# EAGLE board kfly_v3.1_panel (EAGLE 6.5.0), part 1 of 4
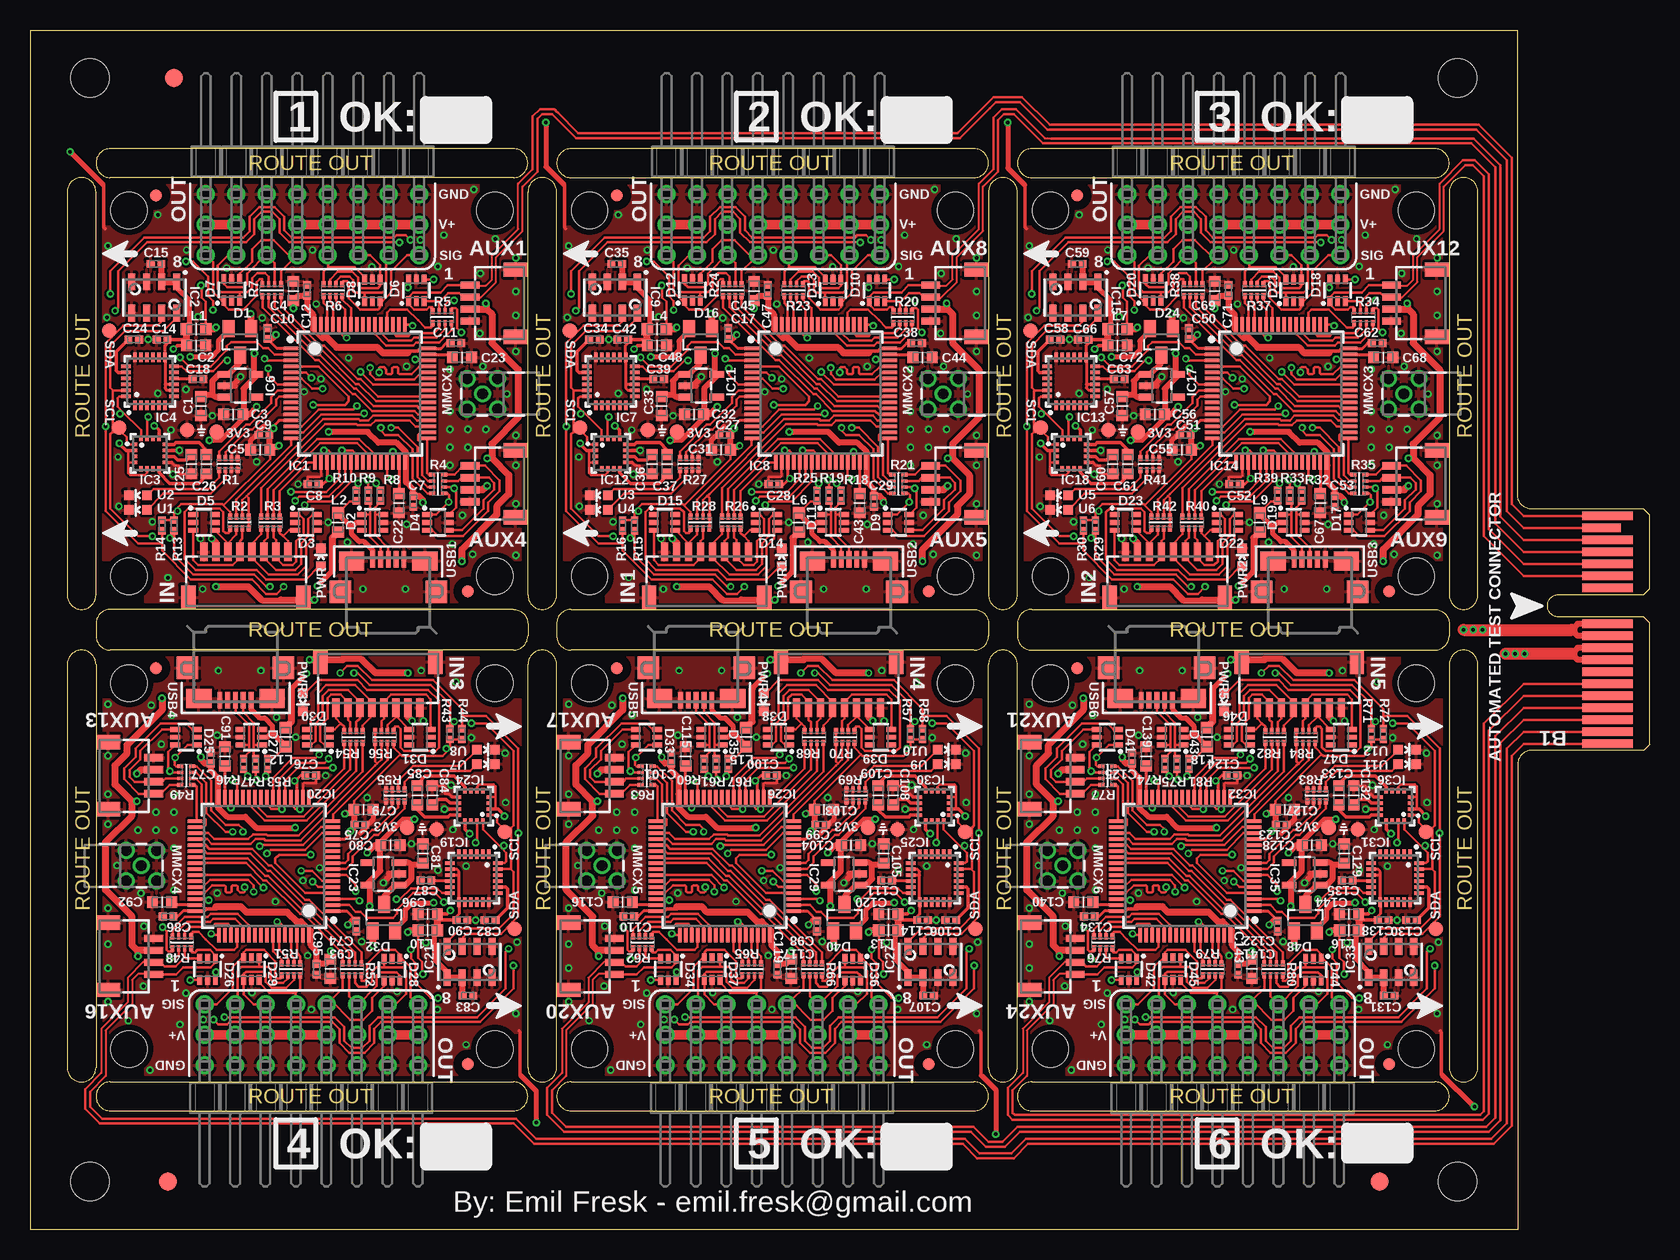
[diagram p0: board, top side]
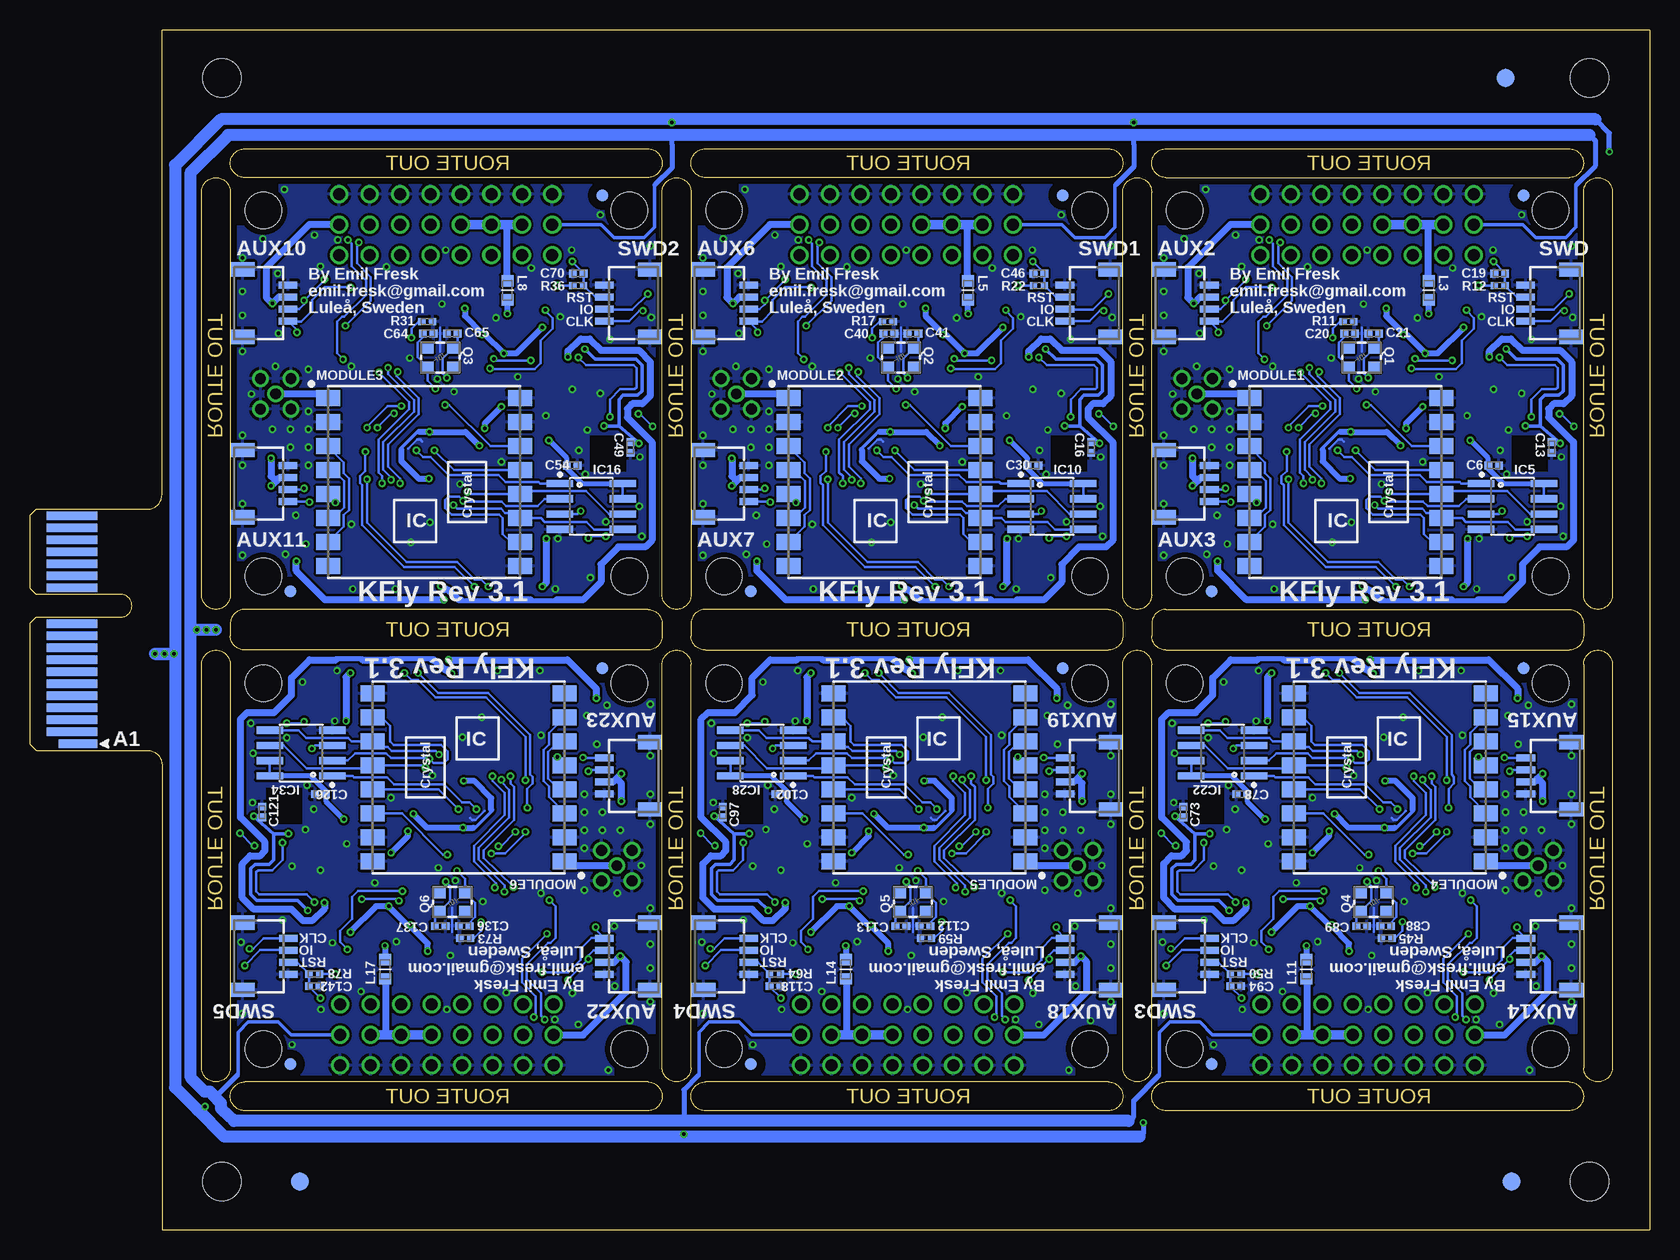
[diagram p1: board, bottom side, seen from below]

Size 135 x 100 mm. Coordinates in mm from the lower left corner, seen from the top.
Outline: 126,60.05 125.2,60.05 arc-90 124,61.25 124,100 0,100 0,0 124,0 124,38.75 arc-90 125.2,39.95 126,39.95
Outline: 5.5,47.1 5.5,13.5 arc-90 4.3,12.3 arc-90 3.1,13.5 3.1,47.1 arc-90 4.3,48.3 arc-90 5.5,47.1
Outline: 6.7,12.3 40.3,12.3 arc-90 41.5,11.1 arc-90 40.3,9.9 6.7,9.9 arc-90 5.5,11.1 arc-90 6.7,12.3
Outline: 41.5,13.5 41.5,47.1 arc-90 42.7,48.3 arc-90 43.9,47.1 43.9,13.5 arc-90 42.7,12.3 arc-90 41.5,13.5
Outline: 40.3,48.3 6.7,48.3 arc-90 5.5,49.5 5.5,50.5 arc-90 6.7,51.7 40.3,51.7 arc-90 41.5,50.5 41.5,49.5 arc-90 40.3,48.3
Outline: 45.1,12.3 78.7,12.3 arc-90 79.9,11.1 arc-90 78.7,9.9 45.1,9.9 arc-90 43.9,11.1 arc-90 45.1,12.3
Outline: 79.9,13.5 79.9,47.1 arc-90 81.1,48.3 arc-90 82.3,47.1 82.3,13.5 arc-90 81.1,12.3 arc-90 79.9,13.5
Outline: 78.7,48.3 45.1,48.3 arc-90 43.9,49.5 43.9,50.5 arc-90 45.1,51.7 78.7,51.7 arc-90 79.9,50.5 79.9,49.5 arc-90 78.7,48.3
Outline: 83.5,12.3 117.1,12.3 arc-90 118.3,11.1 arc-90 117.1,9.9 83.5,9.9 arc-90 82.3,11.1 arc-90 83.5,12.3
Outline: 83.5,48.3 117.1,48.3 arc90 118.3,49.5 118.3,50.5 arc90 117.1,51.7 83.5,51.7 arc90 82.3,50.5 82.3,49.5 arc90 83.5,48.3
Outline: 118.3,47.1 118.3,13.5 arc90 119.5,12.3 arc90 120.7,13.5 120.7,47.1 arc90 119.5,48.3 arc90 118.3,47.1
Outline: 5.5,52.9 5.5,86.5 arc90 4.3,87.7 arc90 3.1,86.5 3.1,52.9 arc90 4.3,51.7 arc90 5.5,52.9
Outline: 41.5,52.9 41.5,86.5 arc-90 42.7,87.7 arc-90 43.9,86.5 43.9,52.9 arc-90 42.7,51.7 arc-90 41.5,52.9
Outline: 40.3,87.7 6.7,87.7 arc-90 5.5,88.9 arc-90 6.7,90.1 40.3,90.1 arc-90 41.5,88.9 arc-90 40.3,87.7
Outline: 45.1,87.7 78.7,87.7 arc90 79.9,88.9 arc90 78.7,90.1 45.1,90.1 arc90 43.9,88.9 arc90 45.1,87.7
Outline: 79.9,86.5 79.9,52.9 arc90 81.1,51.7 arc90 82.3,52.9 82.3,86.5 arc90 81.1,87.7 arc90 79.9,86.5
Outline: 83.5,87.7 117.1,87.7 arc90 118.3,88.9 arc90 117.1,90.1 83.5,90.1 arc90 82.3,88.9 arc90 83.5,87.7
Outline: 118.3,86.5 118.3,52.9 arc90 119.5,51.7 arc90 120.7,52.9 120.7,86.5 arc90 119.5,87.7 arc90 118.3,86.5
Copper layers (1*2*15*16): Top 0.035mm / dielectric 0.4mm / Route2 0.035mm / dielectric 0.4mm / Route15 0.035mm / dielectric 0.4mm / Bottom 0.035mm
Design rules "korken_default": minimum track width 0.15mm, minimum drill 0.3mm, track to track 0.15mm, track to pad 0.15mm, pad to pad 0.15mm, via to via 0.15mm, smd to smd 0mil, copper to edge 0.5mm, drill to drill 0.25mm, minimum pad ring 10mil, minimum via ring 0.15mm, stop-mask expansion 0.05mm, vias tented up to drill 0.4mm, thermal gap 0.25mm
Holes 3.2 mm at 5,4 119,4 119,96 5,96
Holes 3 mm at 8.25,54.45 38.75,54.45 38.75,84.95 8.25,84.95 46.65,54.45 77.15,54.45 77.15,84.95 46.65,84.95 85.05,54.45 115.55,54.45 115.55,84.95 85.05,84.95 38.75,45.55 8.25,45.55 8.25,15.05 38.75,15.05 77.15,45.55 46.65,45.55 46.65,15.05 77.15,15.05 115.55,45.55 85.05,45.55 85.05,15.05 115.55,15.05

## Footprints (pad centres in the part's own frame; a part is rotated, then mirrored left to right if it is on the bottom)
JST-4PIN-SIDE = smd 0.6 x 1.55: 1 1.48,-2.81; 2 0.48,-2.81; 3 -0.52,-2.81; 4 -1.52,-2.81 | smd 1.2 x 2: NC1 2.78,0.99; NC2 -2.82,0.99
CAPC1608X92N = smd 0.9 x 0.95: 1 -0.8,0; 2 0.8,0
CAPC1005X60N = smd 0.65 x 0.65: 1 -0.45,0; 2 0.45,0
SOT23 = smd 1 x 1.4: 1 -0.95,-1.1; 2 0.95,-1.1; 3 0,1.1
SOT363 = smd 0.4 x 0.8: 1 -0.65,-0.9; 2 0,-0.9; 3 0.65,-0.9; 4 0.65,0.9; 5 0,0.9; 6 -0.65,0.9
FID1.5 = smd 1.5 x 1.5: P$1 0,0
PCI_2X18_PCB = smd 0.7 x 3.2 bottom: A1 -9.5,-0.5 | smd 0.7 x 4.2 bottom: A2 -8.5,-1; A3 -7.5,-1; A4 -6.5,-1; A5 -5.5,-1; A6 -4.5,-1; A7 -3.5,-1; A8 -2.5,-1; A9 -1.5,-1; A10 -0.5,-1; A11 0.5,-1; A12 3.5,-1; A13 4.5,-1; A14 5.5,-1; A15 6.5,-1; A16 7.5,-1; A17 8.5,-1; A18 9.5,-1 | smd 0.7 x 4.2: B1 -9.5,-1; B2 -8.5,-1; B3 -7.5,-1; B4 -6.5,-1; B5 -5.5,-1; B6 -4.5,-1; B7 -3.5,-1; B8 -2.5,-1; B9 -1.5,-1; B10 -0.5,-1; B11 0.5,-1; B12 3.5,-1; B13 4.5,-1; B14 5.5,-1; B15 6.5,-1; B16 7.5,-1; B18 9.5,-1 | smd 0.7 x 3.2: B17 8.5,-0.5
M03_90DEG = drill 1: 1 -2.54,0; 2 0,0; 3 2.54,0
FID1.0 = smd 1 x 1: P$1 0,0
LQFP64-10X10 = smd 0.3 x 1.2: 1 -3.75,-5.75; 2 -3.25,-5.75; 3 -2.75,-5.75; 4 -2.25,-5.75; 5 -1.75,-5.75; 6 -1.25,-5.75; 7 -0.75,-5.75; 8 -0.25,-5.75; 9 0.25,-5.75; 10 0.75,-5.75; 11 1.25,-5.75; 12 1.75,-5.75; 13 2.25,-5.75; 14 2.75,-5.75; 15 3.25,-5.75; 16 3.75,-5.75; 33 3.75,5.75; 34 3.25,5.75; 35 2.75,5.75; 36 2.25,5.75; 37 1.75,5.75; 38 1.25,5.75; 39 0.75,5.75; 40 0.25,5.75; 41 -0.25,5.75; 42 -0.75,5.75; 43 -1.25,5.75; 44 -1.75,5.75; 45 -2.25,5.75; 46 -2.75,5.75; 47 -3.25,5.75; 48 -3.75,5.75 | smd 1.2 x 0.3: 17 5.75,-3.75; 18 5.75,-3.25; 19 5.75,-2.75; 20 5.75,-2.25; 21 5.75,-1.75; 22 5.75,-1.25; 23 5.75,-0.75; 24 5.75,-0.25; 25 5.75,0.25; 26 5.75,0.75; 27 5.75,1.25; 28 5.75,1.75; 29 5.75,2.25; 30 5.75,2.75; 31 5.75,3.25; 32 5.75,3.75; 49 -5.75,3.75; 50 -5.75,3.25; 51 -5.75,2.75; 52 -5.75,2.25; 53 -5.75,1.75; 54 -5.75,1.25; 55 -5.75,0.75; 56 -5.75,0.25; 57 -5.75,-0.25; 58 -5.75,-0.75; 59 -5.75,-1.25; 60 -5.75,-1.75; 61 -5.75,-2.25; 62 -5.75,-2.75; 63 -5.75,-3.25; 64 -5.75,-3.75
MS5611 = smd 1.4 x 0.6: 1 -1.3,1.875; 2 -1.3,0.625; 3 -1.3,-0.625; 4 -1.3,-1.875; 5 1.3,-1.875; 6 1.3,-0.625; 7 1.3,0.625; 8 1.3,1.875
LPCC16 = smd 0.45 x 0.3: 1 -1.27,0.75; 2 -1.27,0.25; 3 -1.27,-0.25; 4 -1.27,-0.75; 9 1.27,-0.75; 10 1.27,-0.25; 11 1.27,0.25; 12 1.27,0.75 | smd 0.3 x 0.45: 5 -0.75,-1.27; 6 -0.25,-1.27; 7 0.25,-1.27; 8 0.75,-1.27; 13 0.75,1.27; 14 0.25,1.27; 15 -0.25,1.27; 16 -0.75,1.27
QFN-24 = smd 0.8 x 0.3: 1 -2,1.25; 2 -2,0.75; 3 -2,0.25; 4 -2,-0.25; 5 -2,-0.75; 6 -2,-1.25; 13 2,-1.25; 14 2,-0.75; 15 2,-0.25; 16 2,0.25; 17 2,0.75; 18 2,1.25 | smd 0.3 x 0.8: 7 -1.25,-2; 8 -0.75,-2; 9 -0.25,-2; 10 0.25,-2; 11 0.75,-2; 12 1.25,-2; 19 1.25,2; 20 0.75,2; 21 0.25,2; 22 -0.25,2; 23 -0.75,2; 24 -1.25,2
SO08 = smd 0.61 x 2.21: 1 -1.905,-2.616; 2 -0.635,-2.616; 3 0.635,-2.616; 4 1.905,-2.616; 5 1.905,2.616; 6 0.635,2.616; 7 -0.635,2.616; 8 -1.905,2.616
SOT23-5 = smd 0.55 x 1.2: 1 -0.95,-1.3; 2 0,-1.3; 3 0.95,-1.3; 4 0.95,1.3; 5 -0.95,1.3
JST-8PIN-SIDE = smd 0.6 x 1.55: 1 3.5,-2.8; 2 2.5,-2.8; 3 1.5,-2.8; 4 0.5,-2.8; 5 -0.5,-2.8; 6 -1.5,-2.8; 7 -2.5,-2.8; 8 -3.5,-2.8 | smd 1.2 x 2: NC1 4.8,1; NC2 -4.8,1
INDC1608X95N = smd 0.95 x 1: 1 -0.8,0; 2 0.8,0
MMCX_THROUGHHOLE_RIGHTANGLE = drill 0.9: G1 -1.27,1.27; G2 1.27,1.27; G3 1.27,-1.27; G4 -1.27,-1.27; S 0,0
RFM22-XXX-S2 = smd 2 x 1.3: 1 -8,7; 2 -8,5; 3 -8,3; 4 -8,1; 5 -8,-1; 6 -8,-3; 7 -8,-5; 8 -8,-7; 9 8,-7; 10 8,-5; 11 8,-3; 12 8,-1; 13 8,1; 14 8,3; 15 8,5; 16 8,7
LED-0603 = smd 0.8 x 0.8: A 0,-0.75; C 0,0.75
2.5X3.2CRYSTAL = smd 1 x 0.9: 1 -1.075,-0.775; 2 1.075,-0.775; 3 1.075,0.775; 4 -1.075,0.775
RESISTORARRAY_0804 = smd 0.33 x 0.5: 1 -0.775,-0.5; 4 0.775,-0.5; 5 0.775,0.5; 8 -0.775,0.5 | smd 0.28 x 0.5: 2 -0.25,-0.5; 3 0.25,-0.5; 6 0.25,0.5; 7 -0.25,0.5
RESC1005X40AN = smd 0.6 x 0.6: 1 -0.45,0; 2 0.45,0
TESTPOINT_1.2 = smd 1.2 x 1.2: 1 0,0
MICROUSB_TYPEB_SURFACE = smd 0.4 x 1.35: 1 -1.3,2.65; 2 -0.65,2.65; 3 0,2.65; 4 0.65,2.65; 5 1.3,2.65 | smd 1.8 x 1.9: MNT1 -4,-0.05; MNT2 4,-0.05 | smd 2.1 x 1.6: MNT3 3.05,2.5; MNT4 -3.05,2.5

## Placement (x,y rotation side)
AUX1  JST-4PIN-SIDE-1.0  [JST-4PIN-SIDE]  39.5,77.2 270 top
AUX2  JST-4PIN-SIDE-1.0  [JST-4PIN-SIDE]  39.5,77.25 90 bottom
AUX3  JST-4PIN-SIDE-1.0  [JST-4PIN-SIDE]  39.5,62.2 90 bottom
AUX4  JST-4PIN-SIDE-1.0  [JST-4PIN-SIDE]  39.5,62.15 270 top
AUX5  JST-4PIN-SIDE-1.0  [JST-4PIN-SIDE]  77.9,62.15 270 top
AUX6  JST-4PIN-SIDE-1.0  [JST-4PIN-SIDE]  77.9,77.25 90 bottom
AUX7  JST-4PIN-SIDE-1.0  [JST-4PIN-SIDE]  77.9,62.2 90 bottom
AUX8  JST-4PIN-SIDE-1.0  [JST-4PIN-SIDE]  77.9,77.2 270 top
AUX9  JST-4PIN-SIDE-1.0  [JST-4PIN-SIDE]  116.3,62.15 270 top
AUX10  JST-4PIN-SIDE-1.0  [JST-4PIN-SIDE]  116.3,77.25 90 bottom
AUX11  JST-4PIN-SIDE-1.0  [JST-4PIN-SIDE]  116.3,62.2 90 bottom
AUX12  JST-4PIN-SIDE-1.0  [JST-4PIN-SIDE]  116.3,77.2 270 top
AUX13  JST-4PIN-SIDE-1.0  [JST-4PIN-SIDE]  7.5,37.85 90 top
AUX14  JST-4PIN-SIDE-1.0  [JST-4PIN-SIDE]  7.5,22.75 270 bottom
AUX15  JST-4PIN-SIDE-1.0  [JST-4PIN-SIDE]  7.5,37.8 270 bottom
AUX16  JST-4PIN-SIDE-1.0  [JST-4PIN-SIDE]  7.5,22.8 90 top
AUX17  JST-4PIN-SIDE-1.0  [JST-4PIN-SIDE]  45.9,37.85 90 top
AUX18  JST-4PIN-SIDE-1.0  [JST-4PIN-SIDE]  45.9,22.75 270 bottom
AUX19  JST-4PIN-SIDE-1.0  [JST-4PIN-SIDE]  45.9,37.8 270 bottom
AUX20  JST-4PIN-SIDE-1.0  [JST-4PIN-SIDE]  45.9,22.8 90 top
AUX21  JST-4PIN-SIDE-1.0  [JST-4PIN-SIDE]  84.3,37.85 90 top
AUX22  JST-4PIN-SIDE-1.0  [JST-4PIN-SIDE]  84.3,22.75 270 bottom
AUX23  JST-4PIN-SIDE-1.0  [JST-4PIN-SIDE]  84.3,37.8 270 bottom
AUX24  JST-4PIN-SIDE-1.0  [JST-4PIN-SIDE]  84.3,22.8 90 top
C1  10u  [CAPC1608X92N]  14.25,68.65 270 top
C2  10u  [CAPC1608X92N]  13.85,73.7 0 top
C3  10u  [CAPC1608X92N]  16.95,67.95 180 top
C4  10u  [CAPC1608X92N]  21.95,78.25 90 top
C5  10u  [CAPC1608X92N]  19.2,65 180 top
C6  100n  [CAPC1005X60N]  13,63.7 0 bottom
C7  100n  [CAPC1005X60N]  31.95,60.7 270 top
C8  100n  [CAPC1005X60N]  23.6,62.15 180 top
C9  100n  [CAPC1005X60N]  19.5,66.25 180 top
C10  100n  [CAPC1005X60N]  19.8,74.7 90 top
C11  100n  [CAPC1005X60N]  35.5,73.9 0 top
C12  100n  [CAPC1005X60N]  23.1,78.3 90 top
C13  100n  [CAPC1005X60N]  8.15,65.2 270 bottom
C14  100n  [CAPC1005X60N]  11,74.2 180 top
C15  100n  [CAPC1005X60N]  10.5,80.5 180 top
C16  100n  [CAPC1005X60N]  46.55,65.2 270 bottom
C17  100n  [CAPC1005X60N]  58.2,74.7 90 top
C18  100n  [CAPC1005X60N]  14,70.9 0 top
C19  100n  [CAPC1005X60N]  12.5,79.7 180 bottom
C20  12p  [CAPC1005X60N]  25,74.7 180 bottom
C21  12p  [CAPC1005X60N]  23,74.7 0 bottom
C22  2.2u  [CAPC1608X92N]  30.75,60.55 270 top
C23  2.2u  [CAPC1608X92N]  36,72.7 0 top
C24  2.2n  [CAPC1005X60N]  8.65,74.2 0 top
C25  4.7u  [CAPC1608X92N]  13.45,63.8 270 top
C26  220n  [CAPC1608X92N]  14.7,63.8 90 top
C27  100n  [CAPC1005X60N]  57.9,66.25 180 top
C28  100n  [CAPC1005X60N]  62,62.15 180 top
C29  100n  [CAPC1005X60N]  70.35,60.7 270 top
C30  100n  [CAPC1005X60N]  51.4,63.7 0 bottom
C31  10u  [CAPC1608X92N]  57.6,65 180 top
C32  10u  [CAPC1608X92N]  55.35,67.95 180 top
C33  10u  [CAPC1608X92N]  52.65,68.65 270 top
C34  2.2n  [CAPC1005X60N]  47.05,74.2 0 top
C35  100n  [CAPC1005X60N]  48.9,80.5 180 top
C36  4.7u  [CAPC1608X92N]  51.85,63.8 270 top
C37  220n  [CAPC1608X92N]  53.1,63.8 90 top
C38  100n  [CAPC1005X60N]  73.9,73.9 0 top
C39  100n  [CAPC1005X60N]  52.4,70.9 0 top
C40  12p  [CAPC1005X60N]  63.4,74.7 180 bottom
C41  12p  [CAPC1005X60N]  61.4,74.7 0 bottom
C42  100n  [CAPC1005X60N]  49.4,74.2 180 top
C43  2.2u  [CAPC1608X92N]  69.15,60.55 270 top
C44  2.2u  [CAPC1608X92N]  74.4,72.7 0 top
C45  10u  [CAPC1608X92N]  60.35,78.25 90 top
C46  100n  [CAPC1005X60N]  50.9,79.7 180 bottom
C47  100n  [CAPC1005X60N]  61.5,78.3 90 top
C48  10u  [CAPC1608X92N]  52.25,73.7 0 top
C49  100n  [CAPC1005X60N]  84.95,65.2 270 bottom
C50  100n  [CAPC1005X60N]  96.6,74.7 90 top
C51  100n  [CAPC1005X60N]  96.3,66.25 180 top
C52  100n  [CAPC1005X60N]  100.4,62.15 180 top
C53  100n  [CAPC1005X60N]  108.75,60.7 270 top
C54  100n  [CAPC1005X60N]  89.8,63.7 0 bottom
C55  10u  [CAPC1608X92N]  96,65 180 top
C56  10u  [CAPC1608X92N]  93.75,67.95 180 top
C57  10u  [CAPC1608X92N]  91.05,68.65 270 top
C58  2.2n  [CAPC1005X60N]  85.45,74.2 0 top
C59  100n  [CAPC1005X60N]  87.3,80.5 180 top
C60  4.7u  [CAPC1608X92N]  90.25,63.8 270 top
C61  220n  [CAPC1608X92N]  91.5,63.8 90 top
C62  100n  [CAPC1005X60N]  112.3,73.9 0 top
C63  100n  [CAPC1005X60N]  90.8,70.9 0 top
C64  12p  [CAPC1005X60N]  101.8,74.7 180 bottom
C65  12p  [CAPC1005X60N]  99.8,74.7 0 bottom
C66  100n  [CAPC1005X60N]  87.8,74.2 180 top
C67  2.2u  [CAPC1608X92N]  107.55,60.55 270 top
C68  2.2u  [CAPC1608X92N]  112.8,72.7 0 top
C69  10u  [CAPC1608X92N]  98.75,78.25 90 top
C70  100n  [CAPC1005X60N]  89.3,79.7 180 bottom
C71  100n  [CAPC1005X60N]  99.9,78.3 90 top
C72  10u  [CAPC1608X92N]  90.65,73.7 0 top
C73  100n  [CAPC1005X60N]  38.85,34.8 90 bottom
C74  100n  [CAPC1005X60N]  27.2,25.3 270 top
C75  100n  [CAPC1005X60N]  27.5,33.75 0 top
C76  100n  [CAPC1005X60N]  23.4,37.85 0 top
C77  100n  [CAPC1005X60N]  15.05,39.3 90 top
C78  100n  [CAPC1005X60N]  34,36.3 180 bottom
C79  10u  [CAPC1608X92N]  27.8,35 0 top
C80  10u  [CAPC1608X92N]  30.05,32.05 0 top
C81  10u  [CAPC1608X92N]  32.75,31.35 90 top
C82  2.2n  [CAPC1005X60N]  38.35,25.8 180 top
C83  100n  [CAPC1005X60N]  36.5,19.5 0 top
C84  4.7u  [CAPC1608X92N]  33.55,36.2 90 top
C85  220n  [CAPC1608X92N]  32.3,36.2 270 top
C86  100n  [CAPC1005X60N]  11.5,26.1 180 top
C87  100n  [CAPC1005X60N]  33,29.1 180 top
C88  12p  [CAPC1005X60N]  22,25.3 0 bottom
C89  12p  [CAPC1005X60N]  24,25.3 180 bottom
C90  100n  [CAPC1005X60N]  36,25.8 0 top
C91  2.2u  [CAPC1608X92N]  16.25,39.45 90 top
C92  2.2u  [CAPC1608X92N]  11,27.3 180 top
C93  10u  [CAPC1608X92N]  25.05,21.75 270 top
C94  100n  [CAPC1005X60N]  34.5,20.3 0 bottom
C95  100n  [CAPC1005X60N]  23.9,21.7 270 top
C96  10u  [CAPC1608X92N]  33.15,26.3 180 top
C97  100n  [CAPC1005X60N]  77.25,34.8 90 bottom
C98  100n  [CAPC1005X60N]  65.6,25.3 270 top
C99  100n  [CAPC1005X60N]  65.9,33.75 0 top
C100  100n  [CAPC1005X60N]  61.8,37.85 0 top
C101  100n  [CAPC1005X60N]  53.45,39.3 90 top
C102  100n  [CAPC1005X60N]  72.4,36.3 180 bottom
C103  10u  [CAPC1608X92N]  66.2,35 0 top
C104  10u  [CAPC1608X92N]  68.45,32.05 0 top
C105  10u  [CAPC1608X92N]  71.15,31.35 90 top
C106  2.2n  [CAPC1005X60N]  76.75,25.8 180 top
C107  100n  [CAPC1005X60N]  74.9,19.5 0 top
C108  4.7u  [CAPC1608X92N]  71.95,36.2 90 top
C109  220n  [CAPC1608X92N]  70.7,36.2 270 top
C110  100n  [CAPC1005X60N]  49.9,26.1 180 top
C111  100n  [CAPC1005X60N]  71.4,29.1 180 top
C112  12p  [CAPC1005X60N]  60.4,25.3 0 bottom
C113  12p  [CAPC1005X60N]  62.4,25.3 180 bottom
C114  100n  [CAPC1005X60N]  74.4,25.8 0 top
C115  2.2u  [CAPC1608X92N]  54.65,39.45 90 top
C116  2.2u  [CAPC1608X92N]  49.4,27.3 180 top
C117  10u  [CAPC1608X92N]  63.45,21.75 270 top
C118  100n  [CAPC1005X60N]  72.9,20.3 0 bottom
C119  100n  [CAPC1005X60N]  62.3,21.7 270 top
C120  10u  [CAPC1608X92N]  71.55,26.3 180 top
C121  100n  [CAPC1005X60N]  115.65,34.8 90 bottom
C122  100n  [CAPC1005X60N]  104,25.3 270 top
C123  100n  [CAPC1005X60N]  104.3,33.75 0 top
C124  100n  [CAPC1005X60N]  100.2,37.85 0 top
C125  100n  [CAPC1005X60N]  91.85,39.3 90 top
C126  100n  [CAPC1005X60N]  110.8,36.3 180 bottom
C127  10u  [CAPC1608X92N]  104.6,35 0 top
C128  10u  [CAPC1608X92N]  106.85,32.05 0 top
C129  10u  [CAPC1608X92N]  109.55,31.35 90 top
C130  2.2n  [CAPC1005X60N]  115.15,25.8 180 top
C131  100n  [CAPC1005X60N]  113.3,19.5 0 top
C132  4.7u  [CAPC1608X92N]  110.35,36.2 90 top
C133  220n  [CAPC1608X92N]  109.1,36.2 270 top
C134  100n  [CAPC1005X60N]  88.3,26.1 180 top
C135  100n  [CAPC1005X60N]  109.8,29.1 180 top
C136  12p  [CAPC1005X60N]  98.8,25.3 0 bottom
C137  12p  [CAPC1005X60N]  100.8,25.3 180 bottom
C138  100n  [CAPC1005X60N]  112.8,25.8 0 top
C139  2.2u  [CAPC1608X92N]  93.05,39.45 90 top
C140  2.2u  [CAPC1608X92N]  87.8,27.3 180 top
C141  10u  [CAPC1608X92N]  101.85,21.75 270 top
C142  100n  [CAPC1005X60N]  111.3,20.3 0 bottom
C143  100n  [CAPC1005X60N]  100.7,21.7 270 top
C144  10u  [CAPC1608X92N]  109.95,26.3 180 top
D1  BAT54C  [SOT23]  17.5,74 180 top
D2  ESD5V3U4RRS  [SOT363]  28.55,58.95 270 top
D3  ESD5V3U4RRS  [SOT363]  23,58.95 270 top
D4  ESD5V3U4RRS  [SOT363]  34,58.95 270 top
D5  ESD5V3U4RRS  [SOT363]  14.5,58.95 270 top
D6  ESD5V3U4RRS  [SOT363]  32.2,78.3 0 top
D7  ESD5V3U4RRS  [SOT363]  16.82,78.34 0 top
D8  ESD5V3U4RRS  [SOT363]  28.54,78.29 0 top
D9  ESD5V3U4RRS  [SOT363]  72.4,58.95 270 top
D10  ESD5V3U4RRS  [SOT363]  70.6,78.3 0 top
D11  ESD5V3U4RRS  [SOT363]  66.95,58.95 270 top
D12  ESD5V3U4RRS  [SOT363]  55.22,78.34 0 top
D13  ESD5V3U4RRS  [SOT363]  66.94,78.29 0 top
D14  ESD5V3U4RRS  [SOT363]  61.4,58.95 270 top
D15  ESD5V3U4RRS  [SOT363]  52.9,58.95 270 top
D16  BAT54C  [SOT23]  55.9,74 180 top
D17  ESD5V3U4RRS  [SOT363]  110.8,58.95 270 top
D18  ESD5V3U4RRS  [SOT363]  109,78.3 0 top
D19  ESD5V3U4RRS  [SOT363]  105.35,58.95 270 top
D20  ESD5V3U4RRS  [SOT363]  93.62,78.34 0 top
D21  ESD5V3U4RRS  [SOT363]  105.34,78.29 0 top
D22  ESD5V3U4RRS  [SOT363]  99.8,58.95 270 top
D23  ESD5V3U4RRS  [SOT363]  91.3,58.95 270 top
D24  BAT54C  [SOT23]  94.3,74 180 top
D25  ESD5V3U4RRS  [SOT363]  13,41.05 90 top
D26  ESD5V3U4RRS  [SOT363]  14.8,21.7 180 top
D27  ESD5V3U4RRS  [SOT363]  18.45,41.05 90 top
D28  ESD5V3U4RRS  [SOT363]  30.18,21.66 180 top
D29  ESD5V3U4RRS  [SOT363]  18.46,21.71 180 top
D30  ESD5V3U4RRS  [SOT363]  24,41.05 90 top
D31  ESD5V3U4RRS  [SOT363]  32.5,41.05 90 top
D32  BAT54C  [SOT23]  29.5,26 0 top
D33  ESD5V3U4RRS  [SOT363]  51.4,41.05 90 top
D34  ESD5V3U4RRS  [SOT363]  53.2,21.7 180 top
D35  ESD5V3U4RRS  [SOT363]  56.85,41.05 90 top
D36  ESD5V3U4RRS  [SOT363]  68.58,21.66 180 top
D37  ESD5V3U4RRS  [SOT363]  56.86,21.71 180 top
D38  ESD5V3U4RRS  [SOT363]  62.4,41.05 90 top
D39  ESD5V3U4RRS  [SOT363]  70.9,41.05 90 top
D40  BAT54C  [SOT23]  67.9,26 0 top
D41  ESD5V3U4RRS  [SOT363]  89.8,41.05 90 top
D42  ESD5V3U4RRS  [SOT363]  91.6,21.7 180 top
D43  ESD5V3U4RRS  [SOT363]  95.25,41.05 90 top
D44  ESD5V3U4RRS  [SOT363]  106.98,21.66 180 top
D45  ESD5V3U4RRS  [SOT363]  95.26,21.71 180 top
D46  ESD5V3U4RRS  [SOT363]  100.8,41.05 90 top
D47  ESD5V3U4RRS  [SOT363]  109.3,41.05 90 top
D48  BAT54C  [SOT23]  106.3,26 0 top
E$1  [FID1.5]  12,96 0 top
E$2  [FID1.5]  12,96 0 bottom
E$3  [FID1.5]  11.5,4 0 top
E$4  [FID1.5]  11.5,4 0 bottom
E$5  [FID1.5]  112.5,4 0 top
E$6  [FID1.5]  112.5,4 0 bottom
E$7  [PCI_2X18_PCB]  130.5,50 90 top
ENGINE1  [M03_90DEG]  32.44,83.78 270 top
ENGINE2  [M03_90DEG]  29.9,83.78 270 top
ENGINE3  [M03_90DEG]  27.36,83.78 270 top
ENGINE4  [M03_90DEG]  24.82,83.78 270 top
ENGINE5  [M03_90DEG]  22.28,83.78 270 top
ENGINE6  [M03_90DEG]  19.74,83.78 270 top
ENGINE7  [M03_90DEG]  17.2,83.78 270 top
ENGINE8  [M03_90DEG]  14.66,83.78 270 top
ENGINE9  [M03_90DEG]  70.84,83.78 270 top
ENGINE10  [M03_90DEG]  68.3,83.78 270 top
ENGINE11  [M03_90DEG]  65.76,83.78 270 top
ENGINE12  [M03_90DEG]  63.22,83.78 270 top
ENGINE13  [M03_90DEG]  60.68,83.78 270 top
ENGINE14  [M03_90DEG]  58.14,83.78 270 top
ENGINE15  [M03_90DEG]  55.6,83.78 270 top
ENGINE16  [M03_90DEG]  53.06,83.78 270 top
ENGINE17  [M03_90DEG]  109.24,83.78 270 top
ENGINE18  [M03_90DEG]  106.7,83.78 270 top
ENGINE19  [M03_90DEG]  104.16,83.78 270 top
ENGINE20  [M03_90DEG]  101.62,83.78 270 top
ENGINE21  [M03_90DEG]  99.08,83.78 270 top
ENGINE22  [M03_90DEG]  96.54,83.78 270 top
ENGINE23  [M03_90DEG]  94,83.78 270 top
ENGINE24  [M03_90DEG]  91.46,83.78 270 top
ENGINE25  [M03_90DEG]  14.56,16.22 90 top
ENGINE26  [M03_90DEG]  17.1,16.22 90 top
ENGINE27  [M03_90DEG]  19.64,16.22 90 top
ENGINE28  [M03_90DEG]  22.18,16.22 90 top
ENGINE29  [M03_90DEG]  24.72,16.22 90 top
ENGINE30  [M03_90DEG]  27.26,16.22 90 top
ENGINE31  [M03_90DEG]  29.8,16.22 90 top
ENGINE32  [M03_90DEG]  32.34,16.22 90 top
ENGINE33  [M03_90DEG]  52.96,16.22 90 top
ENGINE34  [M03_90DEG]  55.5,16.22 90 top
ENGINE35  [M03_90DEG]  58.04,16.22 90 top
ENGINE36  [M03_90DEG]  60.58,16.22 90 top
ENGINE37  [M03_90DEG]  63.12,16.22 90 top
ENGINE38  [M03_90DEG]  65.66,16.22 90 top
ENGINE39  [M03_90DEG]  68.2,16.22 90 top
ENGINE40  [M03_90DEG]  70.74,16.22 90 top
ENGINE41  [M03_90DEG]  91.36,16.22 90 top
ENGINE42  [M03_90DEG]  93.9,16.22 90 top
ENGINE43  [M03_90DEG]  96.44,16.22 90 top
ENGINE44  [M03_90DEG]  98.98,16.22 90 top
ENGINE45  [M03_90DEG]  101.52,16.22 90 top
ENGINE46  [M03_90DEG]  104.06,16.22 90 top
ENGINE47  [M03_90DEG]  106.6,16.22 90 top
ENGINE48  [M03_90DEG]  109.14,16.22 90 top
FID1  FIDUTIALS1.0  [FID1.0]  36.5,53.2 0 top
FID2  FIDUTIALS1.0  [FID1.0]  10.5,86.2 0 top
FID3  FIDUTIALS1.0  [FID1.0]  36.5,53.2 0 bottom
FID4  FIDUTIALS1.0  [FID1.0]  10.5,86.2 0 bottom
FID5  FIDUTIALS1.0  [FID1.0]  74.9,53.2 0 top
FID6  FIDUTIALS1.0  [FID1.0]  48.9,86.2 0 top
FID7  FIDUTIALS1.0  [FID1.0]  74.9,53.2 0 bottom
FID8  FIDUTIALS1.0  [FID1.0]  48.9,86.2 0 bottom
FID9  FIDUTIALS1.0  [FID1.0]  113.3,53.2 0 top
FID10  FIDUTIALS1.0  [FID1.0]  87.3,86.2 0 top
FID11  FIDUTIALS1.0  [FID1.0]  113.3,53.2 0 bottom
FID12  FIDUTIALS1.0  [FID1.0]  87.3,86.2 0 bottom
FID13  FIDUTIALS1.0  [FID1.0]  10.5,46.8 180 top
FID14  FIDUTIALS1.0  [FID1.0]  36.5,13.8 180 top
FID15  FIDUTIALS1.0  [FID1.0]  10.5,46.8 180 bottom
FID16  FIDUTIALS1.0  [FID1.0]  36.5,13.8 180 bottom
FID17  FIDUTIALS1.0  [FID1.0]  48.9,46.8 180 top
FID18  FIDUTIALS1.0  [FID1.0]  74.9,13.8 180 top
FID19  FIDUTIALS1.0  [FID1.0]  48.9,46.8 180 bottom
FID20  FIDUTIALS1.0  [FID1.0]  74.9,13.8 180 bottom
FID21  FIDUTIALS1.0  [FID1.0]  87.3,46.8 180 top
FID22  FIDUTIALS1.0  [FID1.0]  113.3,13.8 180 top
FID23  FIDUTIALS1.0  [FID1.0]  87.3,46.8 180 bottom
FID24  FIDUTIALS1.0  [FID1.0]  113.3,13.8 180 bottom
IC1  STM32F405RX  [LQFP64-10X10]  27.5,69.7 270 top
IC2  MS5611-01BA03  [MS5611]  10.35,77.7 270 top
IC3  HMC5983  [LPCC16]  10,64.7 0 top
IC4  MPU-6050  [QFN-24]  10,70.7 90 top
IC5  SPI_FLASH-X25XXSMD  [SO08]  11.41,60.28 270 bottom
IC6  MCP1824  [SOT23-5]  17.55,70.35 270 top
IC7  MPU-6050  [QFN-24]  48.4,70.7 90 top
IC8  STM32F405RX  [LQFP64-10X10]  65.9,69.7 270 top
IC9  MS5611-01BA03  [MS5611]  48.75,77.7 270 top
IC10  SPI_FLASH-X25XXSMD  [SO08]  49.81,60.28 270 bottom
IC11  MCP1824  [SOT23-5]  55.95,70.35 270 top
IC12  HMC5983  [LPCC16]  48.4,64.7 0 top
IC13  MPU-6050  [QFN-24]  86.8,70.7 90 top
IC14  STM32F405RX  [LQFP64-10X10]  104.3,69.7 270 top
IC15  MS5611-01BA03  [MS5611]  87.15,77.7 270 top
IC16  SPI_FLASH-X25XXSMD  [SO08]  88.21,60.28 270 bottom
IC17  MCP1824  [SOT23-5]  94.35,70.35 270 top
IC18  HMC5983  [LPCC16]  86.8,64.7 0 top
IC19  MPU-6050  [QFN-24]  37,29.3 270 top
IC20  STM32F405RX  [LQFP64-10X10]  19.5,30.3 90 top
IC21  MS5611-01BA03  [MS5611]  36.65,22.3 90 top
IC22  SPI_FLASH-X25XXSMD  [SO08]  35.59,39.72 90 bottom
IC23  MCP1824  [SOT23-5]  29.45,29.65 90 top
IC24  HMC5983  [LPCC16]  37,35.3 180 top
IC25  MPU-6050  [QFN-24]  75.4,29.3 270 top
IC26  STM32F405RX  [LQFP64-10X10]  57.9,30.3 90 top
IC27  MS5611-01BA03  [MS5611]  75.05,22.3 90 top
IC28  SPI_FLASH-X25XXSMD  [SO08]  73.99,39.72 90 bottom
IC29  MCP1824  [SOT23-5]  67.85,29.65 90 top
IC30  HMC5983  [LPCC16]  75.4,35.3 180 top
IC31  MPU-6050  [QFN-24]  113.8,29.3 270 top
IC32  STM32F405RX  [LQFP64-10X10]  96.3,30.3 90 top
IC33  MS5611-01BA03  [MS5611]  113.45,22.3 90 top
IC34  SPI_FLASH-X25XXSMD  [SO08]  112.39,39.72 90 bottom
IC35  MCP1824  [SOT23-5]  106.25,29.65 90 top
IC36  HMC5983  [LPCC16]  113.8,35.3 180 top
IN  JST-8PIN-SIDE-1.0  [JST-8PIN-SIDE]  18,53.7 180 top
IN1  JST-8PIN-SIDE-1.0  [JST-8PIN-SIDE]  56.4,53.7 180 top
IN2  JST-8PIN-SIDE-1.0  [JST-8PIN-SIDE]  94.8,53.7 180 top
IN3  JST-8PIN-SIDE-1.0  [JST-8PIN-SIDE]  29,46.3 0 top
IN4  JST-8PIN-SIDE-1.0  [JST-8PIN-SIDE]  67.4,46.3 0 top
IN5  JST-8PIN-SIDE-1.0  [JST-8PIN-SIDE]  105.8,46.3 0 top
L1  [INDC1608X95N]  13.85,75.05 180 top
L2  [INDC1608X95N]  25.7,58.95 270 top
L3  [INDC1608X95N]  18.4,78.3 270 bottom
L4  [INDC1608X95N]  52.25,75.05 180 top
L5  [INDC1608X95N]  56.8,78.3 270 bottom
L6  [INDC1608X95N]  64.1,58.95 270 top
L7  [INDC1608X95N]  90.65,75.05 180 top
L8  [INDC1608X95N]  95.2,78.3 270 bottom
L9  [INDC1608X95N]  102.5,58.95 270 top
L10  [INDC1608X95N]  33.15,24.95 0 top
L11  [INDC1608X95N]  28.6,21.7 90 bottom
L12  [INDC1608X95N]  21.3,41.05 90 top
L13  [INDC1608X95N]  71.55,24.95 0 top
L14  [INDC1608X95N]  67,21.7 90 bottom
L15  [INDC1608X95N]  59.7,41.05 90 top
L16  [INDC1608X95N]  109.95,24.95 0 top
L17  [INDC1608X95N]  105.4,21.7 90 bottom
L18  [INDC1608X95N]  98.1,41.05 90 top
MMCX1  [MMCX_THROUGHHOLE_RIGHTANGLE]  37.72,69.67 90 top
MMCX2  [MMCX_THROUGHHOLE_RIGHTANGLE]  76.12,69.67 90 top
MMCX3  [MMCX_THROUGHHOLE_RIGHTANGLE]  114.52,69.67 90 top
MMCX4  [MMCX_THROUGHHOLE_RIGHTANGLE]  9.28,30.33 270 top
MMCX5  [MMCX_THROUGHHOLE_RIGHTANGLE]  47.68,30.33 270 top
MMCX6  [MMCX_THROUGHHOLE_RIGHTANGLE]  86.08,30.33 270 top
MODULE1  RFM22SMD  [RFM22-XXX-S2]  25.36,62.31 0 bottom
MODULE2  RFM22SMD  [RFM22-XXX-S2]  63.76,62.31 0 bottom
MODULE3  RFM22SMD  [RFM22-XXX-S2]  102.16,62.31 0 bottom
MODULE4  RFM22SMD  [RFM22-XXX-S2]  21.64,37.69 180 bottom
MODULE5  RFM22SMD  [RFM22-XXX-S2]  60.04,37.69 180 bottom
MODULE6  RFM22SMD  [RFM22-XXX-S2]  98.44,37.69 180 bottom
PWR  [LED-0603]  24.25,56.05 0 top
PWR1  [LED-0603]  62.65,56.05 0 top
PWR2  [LED-0603]  101.05,56.05 0 top
PWR3  [LED-0603]  22.75,43.95 180 top
PWR4  [LED-0603]  61.15,43.95 180 top
PWR5  [LED-0603]  99.55,43.95 180 top
Q1  [2.5X3.2CRYSTAL]  24,72.7 0 bottom
Q2  [2.5X3.2CRYSTAL]  62.4,72.7 0 bottom
Q3  [2.5X3.2CRYSTAL]  100.8,72.7 0 bottom
Q4  [2.5X3.2CRYSTAL]  23,27.3 180 bottom
Q5  [2.5X3.2CRYSTAL]  61.4,27.3 180 bottom
Q6  [2.5X3.2CRYSTAL]  99.8,27.3 180 bottom
R1  [RESISTORARRAY_0804]  16.55,63.8 180 top
R2  [RESISTORARRAY_0804]  17.45,58.95 180 top
R3  [RESISTORARRAY_0804]  20.05,58.95 180 top
R4  [RESISTORARRAY_0804]  34,62.15 90 top
R5  [RESISTORARRAY_0804]  34.35,76.05 180 top
R6  [RESISTORARRAY_0804]  25.25,78.3 0 top
R7  [RESISTORARRAY_0804]  20.15,78.3 0 top
R8  22  [RESC1005X40AN]  29.2,61.2 270 top
R9  22  [RESC1005X40AN]  28.2,61.2 270 top
R10  10k  [RESC1005X40AN]  27.2,61.2 270 top
R11  10k  [RESC1005X40AN]  25.09,75.7 180 bottom
R12  10k  [RESC1005X40AN]  12.5,78.7 0 bottom
R13  2.2k  [RESC1005X40AN]  12,58.7 270 top
R14  2.2k  [RESC1005X40AN]  11,58.7 270 top
R15  2.2k  [RESC1005X40AN]  50.4,58.7 270 top
R16  2.2k  [RESC1005X40AN]  49.4,58.7 270 top
R17  10k  [RESC1005X40AN]  63.49,75.7 180 bottom
R18  22  [RESC1005X40AN]  67.6,61.2 270 top
R19  22  [RESC1005X40AN]  66.6,61.2 270 top
R20  [RESISTORARRAY_0804]  72.75,76.05 180 top
R21  [RESISTORARRAY_0804]  72.4,62.15 90 top
R22  10k  [RESC1005X40AN]  50.9,78.7 0 bottom
R23  [RESISTORARRAY_0804]  63.65,78.3 0 top
R24  [RESISTORARRAY_0804]  58.55,78.3 0 top
R25  10k  [RESC1005X40AN]  65.6,61.2 270 top
R26  [RESISTORARRAY_0804]  58.45,58.95 180 top
R27  [RESISTORARRAY_0804]  54.95,63.8 180 top
R28  [RESISTORARRAY_0804]  55.85,58.95 180 top
R29  2.2k  [RESC1005X40AN]  88.8,58.7 270 top
R30  2.2k  [RESC1005X40AN]  87.8,58.7 270 top
R31  10k  [RESC1005X40AN]  101.89,75.7 180 bottom
R32  22  [RESC1005X40AN]  106,61.2 270 top
R33  22  [RESC1005X40AN]  105,61.2 270 top
R34  [RESISTORARRAY_0804]  111.15,76.05 180 top
R35  [RESISTORARRAY_0804]  110.8,62.15 90 top
R36  10k  [RESC1005X40AN]  89.3,78.7 0 bottom
R37  [RESISTORARRAY_0804]  102.05,78.3 0 top
R38  [RESISTORARRAY_0804]  96.95,78.3 0 top
R39  10k  [RESC1005X40AN]  104,61.2 270 top
R40  [RESISTORARRAY_0804]  96.85,58.95 180 top
R41  [RESISTORARRAY_0804]  93.35,63.8 180 top
R42  [RESISTORARRAY_0804]  94.25,58.95 180 top
R43  2.2k  [RESC1005X40AN]  35,41.3 90 top
R44  2.2k  [RESC1005X40AN]  36,41.3 90 top
R45  10k  [RESC1005X40AN]  21.91,24.3 0 bottom
R46  22  [RESC1005X40AN]  17.8,38.8 90 top
R47  22  [RESC1005X40AN]  18.8,38.8 90 top
R48  [RESISTORARRAY_0804]  12.65,23.95 0 top
R49  [RESISTORARRAY_0804]  13,37.85 270 top
R50  10k  [RESC1005X40AN]  34.5,21.3 180 bottom
R51  [RESISTORARRAY_0804]  21.75,21.7 180 top
R52  [RESISTORARRAY_0804]  26.85,21.7 180 top
R53  10k  [RESC1005X40AN]  19.8,38.8 90 top
R54  [RESISTORARRAY_0804]  26.95,41.05 0 top
R55  [RESISTORARRAY_0804]  30.45,36.2 0 top
R56  [RESISTORARRAY_0804]  29.55,41.05 0 top
R57  2.2k  [RESC1005X40AN]  73.4,41.3 90 top
R58  2.2k  [RESC1005X40AN]  74.4,41.3 90 top
R59  10k  [RESC1005X40AN]  60.31,24.3 0 bottom
R60  22  [RESC1005X40AN]  56.2,38.8 90 top
R61  22  [RESC1005X40AN]  57.2,38.8 90 top
R62  [RESISTORARRAY_0804]  51.05,23.95 0 top
R63  [RESISTORARRAY_0804]  51.4,37.85 270 top
R64  10k  [RESC1005X40AN]  72.9,21.3 180 bottom
R65  [RESISTORARRAY_0804]  60.15,21.7 180 top
R66  [RESISTORARRAY_0804]  65.25,21.7 180 top
R67  10k  [RESC1005X40AN]  58.2,38.8 90 top
R68  [RESISTORARRAY_0804]  65.35,41.05 0 top
R69  [RESISTORARRAY_0804]  68.85,36.2 0 top
R70  [RESISTORARRAY_0804]  67.95,41.05 0 top
R71  2.2k  [RESC1005X40AN]  111.8,41.3 90 top
R72  2.2k  [RESC1005X40AN]  112.8,41.3 90 top
R73  10k  [RESC1005X40AN]  98.71,24.3 0 bottom
R74  22  [RESC1005X40AN]  94.6,38.8 90 top
R75  22  [RESC1005X40AN]  95.6,38.8 90 top
R76  [RESISTORARRAY_0804]  89.45,23.95 0 top
R77  [RESISTORARRAY_0804]  89.8,37.85 270 top
R78  10k  [RESC1005X40AN]  111.3,21.3 180 bottom
R79  [RESISTORARRAY_0804]  98.55,21.7 180 top
R80  [RESISTORARRAY_0804]  103.65,21.7 180 top
R81  10k  [RESC1005X40AN]  96.6,38.8 90 top
R82  [RESISTORARRAY_0804]  103.75,41.05 0 top
R83  [RESISTORARRAY_0804]  107.25,36.2 0 top
R84  [RESISTORARRAY_0804]  106.35,41.05 0 top
SWD  JST-4PIN-SIDE-1.0  [JST-4PIN-SIDE]  7.52,77.2 270 bottom
SWD1  JST-4PIN-SIDE-1.0  [JST-4PIN-SIDE]  45.92,77.2 270 bottom
SWD2  JST-4PIN-SIDE-1.0  [JST-4PIN-SIDE]  84.32,77.2 270 bottom
SWD3  JST-4PIN-SIDE-1.0  [JST-4PIN-SIDE]  39.48,22.8 90 bottom
SWD4  JST-4PIN-SIDE-1.0  [JST-4PIN-SIDE]  77.88,22.8 90 bottom
SWD5  JST-4PIN-SIDE-1.0  [JST-4PIN-SIDE]  116.28,22.8 90 bottom
TEST1  [TESTPOINT_1.2]  6.6,74.95 0 top
TEST2  [TESTPOINT_1.2]  7.45,66.85 0 top
TEST3  [TESTPOINT_1.2]  15.55,66.5 0 top
TEST4  [TESTPOINT_1.2]  13.1,66.65 0 top
TEST5  [TESTPOINT_1.2]  45.85,66.85 0 top
TEST6  [TESTPOINT_1.2]  45,74.95 0 top
TEST7  [TESTPOINT_1.2]  53.95,66.5 0 top
TEST8  [TESTPOINT_1.2]  51.5,66.65 0 top
TEST9  [TESTPOINT_1.2]  84.25,66.85 0 top
TEST10  [TESTPOINT_1.2]  83.4,74.95 0 top
TEST11  [TESTPOINT_1.2]  92.35,66.5 0 top
TEST12  [TESTPOINT_1.2]  89.9,66.65 0 top
TEST13  [TESTPOINT_1.2]  39.55,33.15 180 top
TEST14  [TESTPOINT_1.2]  40.4,25.05 180 top
TEST15  [TESTPOINT_1.2]  31.45,33.5 180 top
TEST16  [TESTPOINT_1.2]  33.9,33.35 180 top
TEST17  [TESTPOINT_1.2]  77.95,33.15 180 top
TEST18  [TESTPOINT_1.2]  78.8,25.05 180 top
TEST19  [TESTPOINT_1.2]  69.85,33.5 180 top
TEST20  [TESTPOINT_1.2]  72.3,33.35 180 top
TEST21  [TESTPOINT_1.2]  116.35,33.15 180 top
TEST22  [TESTPOINT_1.2]  117.2,25.05 180 top
TEST23  [TESTPOINT_1.2]  108.25,33.5 180 top
TEST24  [TESTPOINT_1.2]  110.7,33.35 180 top
U1  [LED-0603]  9,60 90 top
U2  [LED-0603]  9,61.2 90 top
U3  [LED-0603]  47.4,61.2 90 top
U4  [LED-0603]  47.4,60 90 top
U5  [LED-0603]  85.8,61.2 90 top
U6  [LED-0603]  85.8,60 90 top
U7  [LED-0603]  38,38.8 270 top
U8  [LED-0603]  38,40 270 top
U9  [LED-0603]  76.4,38.8 270 top
U10  [LED-0603]  76.4,40 270 top
U11  [LED-0603]  114.8,38.8 270 top
U12  [LED-0603]  114.8,40 270 top
USB1  USB-MICRO-B-BOTTOM  [MICROUSB_TYPEB_SURFACE]  29.87,53.22 0 top
USB2  USB-MICRO-B-BOTTOM  [MICROUSB_TYPEB_SURFACE]  68.27,53.22 0 top
USB3  USB-MICRO-B-BOTTOM  [MICROUSB_TYPEB_SURFACE]  106.67,53.22 0 top
USB4  USB-MICRO-B-BOTTOM  [MICROUSB_TYPEB_SURFACE]  17.13,46.78 180 top
USB5  USB-MICRO-B-BOTTOM  [MICROUSB_TYPEB_SURFACE]  55.53,46.78 180 top
USB6  USB-MICRO-B-BOTTOM  [MICROUSB_TYPEB_SURFACE]  93.93,46.78 180 top

## Library data of the parts
AUX1-AUX24 D2-D15 D17-D23 D25-D31 D33-D39 D41-D47 E$1-E$7 ENGINE1-ENGINE48 FID1-FID24 IC1-IC4 IC7-IC9 IC12-IC15 IC18-IC21 IC24-IC27 IC30-IC33 IC36 IN IN1-IN5 MMCX1-MMCX6 Q1-Q6 R1-R7 R20 R21 R23 R24 R26-R28 R34 R35 R37 R38 R40-R42 R48 R49 R51 R52 R54-R56 R62 R63 R65 R66 R68-R70 R76 R77 R79 R80 R82-R84 SWD SWD1-SWD5 TEST1-TEST24 USB1-USB6 = korken
C1-C144 = ipc-7351-capacitor
D1 D16 D24 D32 D40 D48 = diode
IC5 IC6 IC10 IC11 IC16 IC17 IC22 IC23 IC28 IC29 IC34 IC35 MODULE1-MODULE6 PWR PWR1-PWR5 U1-U12 = SparkFun
L1-L18 = ipc-7351-inductor
R8-R19 R22 R25 R29-R33 R36 R39 R43-R47 R50 R53 R57-R61 R64 R67 R71-R75 R78 R81 = ipc-7351-resistor

## Nets
!SRST: C19.1 IC1.7 R12.2 SWD.3
!SRST1: C46.1 IC8.7 R22.2 SWD1.3
!SRST2: C70.1 IC14.7 R36.2 SWD2.3
!SRST3: C94.1 IC20.7 R50.2 SWD3.3
!SRST4: C118.1 IC26.7 R64.2 SWD4.3
!SRST5: C142.1 IC32.7 R78.2 SWD5.3
+3V1: C17.1 C27.1 C28.1 C29.1 C30.1 C31.1 C32.1 C38.1 C45.1 C47.1 IC8.1 IC8.13 IC8.19 IC8.32 IC8.48 IC8.64 IC10.3 IC10.7 IC10.8 IC11.5 L4.1 MODULE2.5 R15.1 R16.1 R22.1 R28.4 TEST7.1
+3V2: C50.1 C51.1 C52.1 C53.1 C54.1 C55.1 C56.1 C62.1 C69.1 C71.1 IC14.1 IC14.13 IC14.19 IC14.32 IC14.48 IC14.64 IC16.3 IC16.7 IC16.8 IC17.5 L7.1 MODULE3.5 R29.1 R30.1 R36.1 R42.4 TEST11.1
+3V3: C3.1 C4.1 C5.1 C6.1 C7.1 C8.1 C9.1 C10.1 C11.1 C12.1 IC1.1 IC1.13 IC1.19 IC1.32 IC1.48 IC1.64 IC5.3 IC5.7 IC5.8 IC6.5 L1.1 MODULE1.5 R2.4 R12.1 R13.1 R14.1 TEST3.1
+3V4: C74.1 C75.1 C76.1 C77.1 C78.1 C79.1 C80.1 C86.1 C93.1 C95.1 IC20.1 IC20.13 IC20.19 IC20.32 IC20.48 IC20.64 IC22.3 IC22.7 IC22.8 IC23.5 L10.1 MODULE4.5 R43.1 R44.1 R50.1 R56.4 TEST15.1
+3V5: C98.1 C99.1 C100.1 C101.1 C102.1 C103.1 C104.1 C110.1 C117.1 C119.1 IC26.1 IC26.13 IC26.19 IC26.32 IC26.48 IC26.64 IC28.3 IC28.7 IC28.8 IC29.5 L13.1 MODULE5.5 R57.1 R58.1 R64.1 R70.4 TEST19.1
+3V6: C122.1 C123.1 C124.1 C125.1 C126.1 C127.1 C128.1 C134.1 C141.1 C143.1 IC32.1 IC32.13 IC32.19 IC32.32 IC32.48 IC32.64 IC34.3 IC34.7 IC34.8 IC35.5 L16.1 MODULE6.5 R71.1 R72.1 R78.1 R84.4 TEST23.1
+5V: AUX1.2 AUX2.2 AUX3.2 AUX4.2 ENGINE1.2 ENGINE2.2 ENGINE3.2 ENGINE4.2 ENGINE5.2 ENGINE6.2 ENGINE7.2 ENGINE8.2 IN.2 IN.NC2 L3.1
+5V1: AUX5.2 AUX6.2 AUX7.2 AUX8.2 ENGINE9.2 ENGINE10.2 ENGINE11.2 ENGINE12.2 ENGINE13.2 ENGINE14.2 ENGINE15.2 ENGINE16.2 IN1.2 IN1.NC2 L5.1
+5V2: AUX9.2 AUX10.2 AUX11.2 AUX12.2 ENGINE17.2 ENGINE18.2 ENGINE19.2 ENGINE20.2 ENGINE21.2 ENGINE22.2 ENGINE23.2 ENGINE24.2 IN2.2 IN2.NC2 L8.1
+5V3: AUX13.2 AUX14.2 AUX15.2 AUX16.2 ENGINE25.2 ENGINE26.2 ENGINE27.2 ENGINE28.2 ENGINE29.2 ENGINE30.2 ENGINE31.2 ENGINE32.2 IN3.2 IN3.NC2 L11.1
+5V4: AUX17.2 AUX18.2 AUX19.2 AUX20.2 ENGINE33.2 ENGINE34.2 ENGINE35.2 ENGINE36.2 ENGINE37.2 ENGINE38.2 ENGINE39.2 ENGINE40.2 IN4.2 IN4.NC2 L14.1
+5V5: AUX21.2 AUX22.2 AUX23.2 AUX24.2 ENGINE41.2 ENGINE42.2 ENGINE43.2 ENGINE44.2 ENGINE45.2 ENGINE46.2 ENGINE47.2 ENGINE48.2 IN5.2 IN5.NC2 L17.1
CAN_RX: IC1.33 R4.5
CAN_RX1: IC8.33 R21.5
CAN_RX2: IC14.33 R35.5
CAN_RX3: IC20.33 R49.5
CAN_RX4: IC26.33 R63.5
CAN_RX5: IC32.33 R77.5
CAN_TX: IC1.34 R4.6
CAN_TX1: IC8.34 R21.6
CAN_TX2: IC14.34 R35.6
CAN_TX3: IC20.34 R49.6
CAN_TX4: IC26.34 R63.6
CAN_TX5: IC32.34 R77.6
CONTROLL1_IN: IC1.26 R3.2
CONTROLL1_IN1: IC8.26 R26.2
CONTROLL1_IN2: IC14.26 R40.2
CONTROLL1_IN3: IC20.26 R54.2
CONTROLL1_IN4: IC26.26 R68.2
CONTROLL1_IN5: IC32.26 R82.2
CONTROLL2_IN: IC1.27 R3.3
CONTROLL2_IN1: IC8.27 R26.3
CONTROLL2_IN2: IC14.27 R40.3
CONTROLL2_IN3: IC20.27 R54.3
CONTROLL2_IN4: IC26.27 R68.3
CONTROLL2_IN5: IC32.27 R82.3
CONTROLL3_IN: IC1.35 R3.4
CONTROLL3_IN1: IC8.35 R26.4
CONTROLL3_IN2: IC14.35 R40.4
CONTROLL3_IN3: IC20.35 R54.4
CONTROLL3_IN4: IC26.35 R68.4
CONTROLL3_IN5: IC32.35 R82.4
CONTROLL4_IN: IC1.36 R2.1 R2.2 R2.8
CONTROLL4_IN1: IC8.36 R28.1 R28.2 R28.8
CONTROLL4_IN2: IC14.36 R42.1 R42.2 R42.8
CONTROLL4_IN3: IC20.36 R56.1 R56.2 R56.8
CONTROLL4_IN4: IC26.36 R70.1 R70.2 R70.8
CONTROLL4_IN5: IC32.36 R84.1 R84.2 R84.8
CONTROLL5_IN: IC1.16 R2.3
CONTROLL5_IN1: IC8.16 R28.3
CONTROLL5_IN2: IC14.16 R42.3
CONTROLL5_IN3: IC20.16 R56.3
CONTROLL5_IN4: IC26.16 R70.3
CONTROLL5_IN5: IC32.16 R84.3
CONTROLL6_IN: IC1.17 R3.1
CONTROLL6_IN1: IC8.17 R26.1
CONTROLL6_IN2: IC14.17 R40.1
CONTROLL6_IN3: IC20.17 R54.1
CONTROLL6_IN4: IC26.17 R68.1
CONTROLL6_IN5: IC32.17 R82.1
D_N: IC1.44 R9.1
D_N1: IC8.44 R19.1
D_N2: IC14.44 R33.1
D_N3: IC20.44 R47.1
D_N4: IC26.44 R61.1
D_N5: IC32.44 R75.1
D_P: IC1.45 R8.1
D_P1: IC8.45 R18.1
D_P2: IC14.45 R32.1
D_P3: IC20.45 R46.1
D_P4: IC26.45 R60.1
D_P5: IC32.45 R74.1
ENGINE1_PWM: IC1.62 R6.1
ENGINE1_PWM1: IC8.62 R23.1
ENGINE1_PWM2: IC14.62 R37.1
ENGINE1_PWM3: IC20.62 R51.1
ENGINE1_PWM4: IC26.62 R65.1
ENGINE1_PWM5: IC32.62 R79.1
ENGINE2_PWM: IC1.61 R6.2
ENGINE2_PWM1: IC8.61 R23.2
ENGINE2_PWM2: IC14.61 R37.2
ENGINE2_PWM3: IC20.61 R51.2
ENGINE2_PWM4: IC26.61 R65.2
ENGINE2_PWM5: IC32.61 R79.2
ENGINE3_PWM: IC1.59 R6.3
ENGINE3_PWM1: IC8.59 R23.3
ENGINE3_PWM2: IC14.59 R37.3
ENGINE3_PWM3: IC20.59 R51.3
ENGINE3_PWM4: IC26.59 R65.3
ENGINE3_PWM5: IC32.59 R79.3
ENGINE4_PWM: IC1.58 R6.4
ENGINE4_PWM1: IC8.58 R23.4
ENGINE4_PWM2: IC14.58 R37.4
ENGINE4_PWM3: IC20.58 R51.4
ENGINE4_PWM4: IC26.58 R65.4
ENGINE4_PWM5: IC32.58 R79.4
ENGINE5_PWM: IC1.40 R7.4
ENGINE5_PWM1: IC8.40 R24.4
ENGINE5_PWM2: IC14.40 R38.4
ENGINE5_PWM3: IC20.40 R52.4
ENGINE5_PWM4: IC26.40 R66.4
ENGINE5_PWM5: IC32.40 R80.4
ENGINE6_PWM: IC1.39 R7.3
ENGINE6_PWM1: IC8.39 R24.3
ENGINE6_PWM2: IC14.39 R38.3
ENGINE6_PWM3: IC20.39 R52.3
ENGINE6_PWM4: IC26.39 R66.3
ENGINE6_PWM5: IC32.39 R80.3
ENGINE7_PWM: IC1.38 R7.2
ENGINE7_PWM1: IC8.38 R24.2
ENGINE7_PWM2: IC14.38 R38.2
ENGINE7_PWM3: IC20.38 R52.2
ENGINE7_PWM4: IC26.38 R66.2
ENGINE7_PWM5: IC32.38 R80.2
ENGINE8_PWM: IC1.37 R7.1
ENGINE8_PWM1: IC8.37 R24.1
ENGINE8_PWM2: IC14.37 R38.1
ENGINE8_PWM3: IC20.37 R52.1
ENGINE8_PWM4: IC26.37 R66.1
ENGINE8_PWM5: IC32.37 R80.1
FLASH_SEL: IC1.24 IC5.1
FLASH_SEL1: IC8.24 IC10.1
FLASH_SEL2: IC14.24 IC16.1
FLASH_SEL3: IC20.24 IC22.1
FLASH_SEL4: IC26.24 IC28.1
FLASH_SEL5: IC32.24 IC34.1
GND: AUX1.1 AUX1.NC1 AUX1.NC2 AUX2.1 AUX2.NC1 AUX2.NC2 AUX3.1 AUX3.NC1 AUX3.NC2 AUX4.1 AUX4.NC1 AUX4.NC2 C1.2 C2.2 C3.2 C4.2 C5.2 C6.2 C7.2 C8.2 C9.2 C10.2 C11.2 C12.2 C13.2 C14.2 C15.2 C18.2 C19.2 C20.1 C21.1 C22.2 C23.2 C24.2 C25.2 D2.5 D3.5 D4.5 D5.5 D6.5 D7.5 D8.5 ENGINE1.1 ENGINE2.1 ENGINE3.1 ENGINE4.1 ENGINE5.1 ENGINE6.1 ENGINE7.1 ENGINE8.1 IC1.12 IC1.18 IC1.63 IC2.3 IC2.4 IC2.5 IC3.9 IC3.11 IC4.18 IC5.4 IC6.2 IN.1 IN.NC1 MMCX1.G1 MMCX1.G2 MMCX1.G3 MMCX1.G4 MODULE1.2 MODULE1.9 MODULE1.15 MODULE1.16 PWR.C R1.1 R1.2 R1.7 R1.8 R11.1 SWD.4 SWD.NC1 SWD.NC2 TEST4.1 U1.C U2.C USB1.5 USB1.MNT1 USB1.MNT2 USB1.MNT3 USB1.MNT4
GND1: AUX5.1 AUX5.NC1 AUX5.NC2 AUX6.1 AUX6.NC1 AUX6.NC2 AUX7.1 AUX7.NC1 AUX7.NC2 AUX8.1 AUX8.NC1 AUX8.NC2 C16.2 C17.2 C27.2 C28.2 C29.2 C30.2 C31.2 C32.2 C33.2 C34.2 C35.2 C36.2 C38.2 C39.2 C40.1 C41.1 C42.2 C43.2 C44.2 C45.2 C46.2 C47.2 C48.2 D9.5 D10.5 D11.5 D12.5 D13.5 D14.5 D15.5 ENGINE9.1 ENGINE10.1 ENGINE11.1 ENGINE12.1 ENGINE13.1 ENGINE14.1 ENGINE15.1 ENGINE16.1 IC7.18 IC8.12 IC8.18 IC8.63 IC9.3 IC9.4 IC9.5 IC10.4 IC11.2 IC12.9 IC12.11 IN1.1 IN1.NC1 MMCX2.G1 MMCX2.G2 MMCX2.G3 MMCX2.G4 MODULE2.2 MODULE2.9 MODULE2.15 MODULE2.16 PWR1.C R17.1 R27.1 R27.2 R27.7 R27.8 SWD1.4 SWD1.NC1 SWD1.NC2 TEST8.1 U3.C U4.C USB2.5 USB2.MNT1 USB2.MNT2 USB2.MNT3 USB2.MNT4
GND2: AUX9.1 AUX9.NC1 AUX9.NC2 AUX10.1 AUX10.NC1 AUX10.NC2 AUX11.1 AUX11.NC1 AUX11.NC2 AUX12.1 AUX12.NC1 AUX12.NC2 C49.2 C50.2 C51.2 C52.2 C53.2 C54.2 C55.2 C56.2 C57.2 C58.2 C59.2 C60.2 C62.2 C63.2 C64.1 C65.1 C66.2 C67.2 C68.2 C69.2 C70.2 C71.2 C72.2 D17.5 D18.5 D19.5 D20.5 D21.5 D22.5 D23.5 ENGINE17.1 ENGINE18.1 ENGINE19.1 ENGINE20.1 ENGINE21.1 ENGINE22.1 ENGINE23.1 ENGINE24.1 IC13.18 IC14.12 IC14.18 IC14.63 IC15.3 IC15.4 IC15.5 IC16.4 IC17.2 IC18.9 IC18.11 IN2.1 IN2.NC1 MMCX3.G1 MMCX3.G2 MMCX3.G3 MMCX3.G4 MODULE3.2 MODULE3.9 MODULE3.15 MODULE3.16 PWR2.C R31.1 R41.1 R41.2 R41.7 R41.8 SWD2.4 SWD2.NC1 SWD2.NC2 TEST12.1 U5.C U6.C USB3.5 USB3.MNT1 USB3.MNT2 USB3.MNT3 USB3.MNT4
GND3: AUX13.1 AUX13.NC1 AUX13.NC2 AUX14.1 AUX14.NC1 AUX14.NC2 AUX15.1 AUX15.NC1 AUX15.NC2 AUX16.1 AUX16.NC1 AUX16.NC2 C73.2 C74.2 C75.2 C76.2 C77.2 C78.2 C79.2 C80.2 C81.2 C82.2 C83.2 C84.2 C86.2 C87.2 C88.1 C89.1 C90.2 C91.2 C92.2 C93.2 C94.2 C95.2 C96.2 D25.5 D26.5 D27.5 D28.5 D29.5 D30.5 D31.5 ENGINE25.1 ENGINE26.1 ENGINE27.1 ENGINE28.1 ENGINE29.1 ENGINE30.1 ENGINE31.1 ENGINE32.1 IC19.18 IC20.12 IC20.18 IC20.63 IC21.3 IC21.4 IC21.5 IC22.4 IC23.2 IC24.9 IC24.11 IN3.1 IN3.NC1 MMCX4.G1 MMCX4.G2 MMCX4.G3 MMCX4.G4 MODULE4.2 MODULE4.9 MODULE4.15 MODULE4.16 PWR3.C R45.1 R55.1 R55.2 R55.7 R55.8 SWD3.4 SWD3.NC1 SWD3.NC2 TEST16.1 U7.C U8.C USB4.5 USB4.MNT1 USB4.MNT2 USB4.MNT3 USB4.MNT4
GND4: AUX17.1 AUX17.NC1 AUX17.NC2 AUX18.1 AUX18.NC1 AUX18.NC2 AUX19.1 AUX19.NC1 AUX19.NC2 AUX20.1 AUX20.NC1 AUX20.NC2 C97.2 C98.2 C99.2 C100.2 C101.2 C102.2 C103.2 C104.2 C105.2 C106.2 C107.2 C108.2 C110.2 C111.2 C112.1 C113.1 C114.2 C115.2 C116.2 C117.2 C118.2 C119.2 C120.2 D33.5 D34.5 D35.5 D36.5 D37.5 D38.5 D39.5 ENGINE33.1 ENGINE34.1 ENGINE35.1 ENGINE36.1 ENGINE37.1 ENGINE38.1 ENGINE39.1 ENGINE40.1 IC25.18 IC26.12 IC26.18 IC26.63 IC27.3 IC27.4 IC27.5 IC28.4 IC29.2 IC30.9 IC30.11 IN4.1 IN4.NC1 MMCX5.G1 MMCX5.G2 MMCX5.G3 MMCX5.G4 MODULE5.2 MODULE5.9 MODULE5.15 MODULE5.16 PWR4.C R59.1 R69.1 R69.2 R69.7 R69.8 SWD4.4 SWD4.NC1 SWD4.NC2 TEST20.1 U9.C U10.C USB5.5 USB5.MNT1 USB5.MNT2 USB5.MNT3 USB5.MNT4
GND5: AUX21.1 AUX21.NC1 AUX21.NC2 AUX22.1 AUX22.NC1 AUX22.NC2 AUX23.1 AUX23.NC1 AUX23.NC2 AUX24.1 AUX24.NC1 AUX24.NC2 C121.2 C122.2 C123.2 C124.2 C125.2 C126.2 C127.2 C128.2 C129.2 C130.2 C131.2 C132.2 C134.2 C135.2 C136.1 C137.1 C138.2 C139.2 C140.2 C141.2 C142.2 C143.2 C144.2 D41.5 D42.5 D43.5 D44.5 D45.5 D46.5 D47.5 ENGINE41.1 ENGINE42.1 ENGINE43.1 ENGINE44.1 ENGINE45.1 ENGINE46.1 ENGINE47.1 ENGINE48.1 IC31.18 IC32.12 IC32.18 IC32.63 IC33.3 IC33.4 IC33.5 IC34.4 IC35.2 IC36.9 IC36.11 IN5.1 IN5.NC1 MMCX6.G1 MMCX6.G2 MMCX6.G3 MMCX6.G4 MODULE6.2 MODULE6.9 MODULE6.15 MODULE6.16 PWR5.C R73.1 R83.1 R83.2 R83.7 R83.8 SWD5.4 SWD5.NC1 SWD5.NC2 TEST24.1 U11.C U12.C USB6.5 USB6.MNT1 USB6.MNT2 USB6.MNT3 USB6.MNT4
GND_PANEL: E$7.B8 E$7.B9
MAG_INT: IC1.2 IC3.15
MAG_INT1: IC8.2 IC12.15
MAG_INT2: IC14.2 IC18.15
MAG_INT3: IC20.2 IC24.15
MAG_INT4: IC26.2 IC30.15
MAG_INT5: IC32.2 IC36.15
MPU_INT: IC1.3 IC4.12
MPU_INT1: IC7.12 IC8.3
MPU_INT2: IC13.12 IC14.3
MPU_INT3: IC19.12 IC20.3
MPU_INT4: IC25.12 IC26.3
MPU_INT5: IC31.12 IC32.3
N$1: C25.1 IC3.10
N$2: D2.6 R8.2 USB1.3
N$3: D7.1 ENGINE8.3 R7.8
N$4: D7.3 ENGINE7.3 R7.7
N$5: D7.6 ENGINE6.3 R7.6
N$6: AUX2.3 D6.4 R5.2
N$7: D2.1 R9.2 USB1.2
N$8: C26.1 IC3.8
N$9: PWR.A R2.5
N$10: C26.2 IC3.12
N$11: R1.5 U2.A
N$12: D7.4 ENGINE5.3 R7.5
N$13: C18.1 IC4.10
N$14: C24.1 IC4.20
N$15: AUX3.3 D4.6 R4.2
N$16: D8.1 ENGINE2.3 R6.6
N$17: D8.3 ENGINE1.3 R6.5
N$18: R1.6 U1.A
N$19: IC1.60 R11.2
N$20: IC1.8 R1.4
N$21: D1.2 L2.2
N$22: D8.6 ENGINE4.3 R6.8
N$23: D5.4 IN.3 R2.6
N$24: IC1.9 R1.3
N$25: C20.2 IC1.6 Q1.1
N$26: C21.2 IC1.5 Q1.3
N$27: D3.3 IN.8 R3.8
N$28: D3.4 IN.5 R3.5
N$29: D8.4 ENGINE3.3 R6.7
N$30: AUX4.4 D4.3 R4.4
N$31: AUX4.3 D4.4 R4.3
N$32: AUX3.4 D4.1 R4.1
N$33: D3.1 IN.7 R3.7
N$34: D3.6 IN.6 R3.6
N$35: IC1.42 R10.1
N$36: C43.1 IC8.31
N$37: C44.1 IC8.47
N$38: AUX1.3 D6.3 R5.3
N$39: IC8.60 R17.2
N$40: AUX2.4 D6.6 R5.1
N$41: IC8.42 R25.1
N$42: PWR1.A R28.5
N$43: R27.6 U4.A
N$44: C22.1 IC1.31
N$45: D1.1 L3.2
N$46: D5.3 IN.4 R2.7
N$47: IC8.8 R27.4
N$48: IC8.9 R27.3
N$49: D16.1 L5.2
N$50: C23.1 IC1.47
N$51: AUX1.4 D6.1 R5.4
N$52: D16.2 L6.2
N$53: C36.1 IC12.10
N$54: C37.1 IC12.8
N$55: C37.2 IC12.12
N$56: MMCX1.S MODULE1.1
N$57: C39.1 IC7.10
N$58: C34.1 IC7.20
N$59: D11.6 R18.2 USB2.3
N$60: D11.1 R19.2 USB2.2
N$61: AUX6.4 D10.6 R20.1
N$62: AUX8.4 D10.1 R20.4
N$63: D15.3 IN1.4 R28.7
N$64: D15.4 IN1.3 R28.6
N$65: D12.3 ENGINE15.3 R24.7
N$66: D12.6 ENGINE14.3 R24.6
N$67: MODULE1.4 MODULE1.6
N$68: MODULE1.3 MODULE1.7
N$69: D13.1 ENGINE10.3 R23.6
N$70: D13.3 ENGINE9.3 R23.5
N$71: MMCX2.S MODULE2.1
N$72: MODULE2.4 MODULE2.6
N$73: MODULE2.3 MODULE2.7
N$74: C40.2 IC8.6 Q2.1
N$75: C41.2 IC8.5 Q2.3
N$76: D14.3 IN1.8 R26.8
N$77: D14.4 IN1.5 R26.5
N$78: D13.6 ENGINE12.3 R23.8
N$79: D13.4 ENGINE11.3 R23.7
N$80: D12.4 ENGINE13.3 R24.5
N$81: D12.1 ENGINE16.3 R24.8
N$82: AUX6.3 D10.4 R20.2
N$83: AUX5.4 D9.3 R21.4
N$84: AUX5.3 D9.4 R21.3
N$85: R27.5 U3.A
N$86: AUX7.3 D9.6 R21.2
N$87: AUX7.4 D9.1 R21.1
N$88: D14.1 IN1.7 R26.7
N$89: D14.6 IN1.6 R26.6
N$90: AUX8.3 D10.3 R20.3
N$91: C67.1 IC14.31
N$92: C68.1 IC14.47
N$93: IC14.60 R31.2
N$94: IC14.42 R39.1
N$95: PWR2.A R42.5
N$96: R41.6 U6.A
N$97: IC14.8 R41.4
N$98: IC14.9 R41.3
N$99: D24.1 L8.2
N$100: D24.2 L9.2
N$101: C60.1 IC18.10
N$102: C61.1 IC18.8
N$103: C61.2 IC18.12
N$104: C63.1 IC13.10
N$105: C58.1 IC13.20
N$106: D19.6 R32.2 USB3.3
N$107: D19.1 R33.2 USB3.2
N$108: AUX10.4 D18.6 R34.1
N$109: AUX12.4 D18.1 R34.4
N$110: D23.3 IN2.4 R42.7
N$111: D23.4 IN2.3 R42.6
N$112: D20.3 ENGINE23.3 R38.7
N$113: D20.6 ENGINE22.3 R38.6
N$114: D21.1 ENGINE18.3 R37.6
N$115: D21.3 ENGINE17.3 R37.5
N$116: MMCX3.S MODULE3.1
N$117: MODULE3.4 MODULE3.6
N$118: MODULE3.3 MODULE3.7
N$119: C64.2 IC14.6 Q3.1
N$120: C65.2 IC14.5 Q3.3
N$121: D22.3 IN2.8 R40.8
N$122: D22.4 IN2.5 R40.5
N$123: D21.6 ENGINE20.3 R37.8
N$124: D21.4 ENGINE19.3 R37.7
N$125: D20.4 ENGINE21.3 R38.5
N$126: D20.1 ENGINE24.3 R38.8
N$127: AUX10.3 D18.4 R34.2
N$128: AUX9.4 D17.3 R35.4
N$129: AUX9.3 D17.4 R35.3
N$130: R41.5 U5.A
N$131: AUX11.3 D17.6 R35.2
N$132: AUX11.4 D17.1 R35.1
N$133: D22.1 IN2.7 R40.7
N$134: D22.6 IN2.6 R40.6
N$135: AUX12.3 D18.3 R34.3
N$136: C91.1 IC20.31
N$137: C92.1 IC20.47
N$138: IC20.60 R45.2
N$139: IC20.42 R53.1
N$140: PWR3.A R56.5
N$141: R55.6 U8.A
N$142: IC20.8 R55.4
N$143: IC20.9 R55.3
N$144: D32.1 L11.2
N$145: D32.2 L12.2
N$146: C84.1 IC24.10
N$147: C85.1 IC24.8
N$148: C85.2 IC24.12
N$149: C87.1 IC19.10
N$150: C82.1 IC19.20
N$151: D27.6 R46.2 USB4.3
N$152: D27.1 R47.2 USB4.2
N$153: AUX14.4 D26.6 R48.1
N$154: AUX16.4 D26.1 R48.4
N$155: D31.3 IN3.4 R56.7
N$156: D31.4 IN3.3 R56.6
N$157: D28.3 ENGINE31.3 R52.7
N$158: D28.6 ENGINE30.3 R52.6
N$159: D29.1 ENGINE26.3 R51.6
N$160: D29.3 ENGINE25.3 R51.5
N$161: MMCX4.S MODULE4.1
N$162: MODULE4.4 MODULE4.6
N$163: MODULE4.3 MODULE4.7
N$164: C88.2 IC20.6 Q4.1
N$165: C89.2 IC20.5 Q4.3
N$166: D30.3 IN3.8 R54.8
N$167: D30.4 IN3.5 R54.5
N$168: D29.6 ENGINE28.3 R51.8
N$169: D29.4 ENGINE27.3 R51.7
N$170: D28.4 ENGINE29.3 R52.5
N$171: D28.1 ENGINE32.3 R52.8
N$172: AUX14.3 D26.4 R48.2
N$173: AUX13.4 D25.3 R49.4
N$174: AUX13.3 D25.4 R49.3
N$175: R55.5 U7.A
N$176: AUX15.3 D25.6 R49.2
N$177: AUX15.4 D25.1 R49.1
N$178: D30.1 IN3.7 R54.7
N$179: D30.6 IN3.6 R54.6
N$180: AUX16.3 D26.3 R48.3
N$181: C115.1 IC26.31
N$182: C116.1 IC26.47
N$183: IC26.60 R59.2
N$184: IC26.42 R67.1
N$185: PWR4.A R70.5
N$186: R69.6 U10.A
N$187: IC26.8 R69.4
N$188: IC26.9 R69.3
N$189: D40.1 L14.2
N$190: D40.2 L15.2
N$191: C108.1 IC30.10
N$192: C109.1 IC30.8
N$193: C109.2 IC30.12
N$194: C111.1 IC25.10
N$195: C106.1 IC25.20
N$196: D35.6 R60.2 USB5.3
N$197: D35.1 R61.2 USB5.2
N$198: AUX18.4 D34.6 R62.1
N$199: AUX20.4 D34.1 R62.4
N$200: D39.3 IN4.4 R70.7
N$201: D39.4 IN4.3 R70.6
N$202: D36.3 ENGINE39.3 R66.7
N$203: D36.6 ENGINE38.3 R66.6
N$204: D37.1 ENGINE34.3 R65.6
N$205: D37.3 ENGINE33.3 R65.5
N$206: MMCX5.S MODULE5.1
N$207: MODULE5.4 MODULE5.6
N$208: MODULE5.3 MODULE5.7
N$209: C112.2 IC26.6 Q5.1
N$210: C113.2 IC26.5 Q5.3
N$211: D38.3 IN4.8 R68.8
N$212: D38.4 IN4.5 R68.5
N$213: D37.6 ENGINE36.3 R65.8
N$214: D37.4 ENGINE35.3 R65.7
N$215: D36.4 ENGINE37.3 R66.5
N$216: D36.1 ENGINE40.3 R66.8
N$217: AUX18.3 D34.4 R62.2
N$218: AUX17.4 D33.3 R63.4
N$219: AUX17.3 D33.4 R63.3
N$220: R69.5 U9.A
N$221: AUX19.3 D33.6 R63.2
N$222: AUX19.4 D33.1 R63.1
N$223: D38.1 IN4.7 R68.7
N$224: D38.6 IN4.6 R68.6
N$225: AUX20.3 D34.3 R62.3
N$226: C139.1 IC32.31
N$227: C140.1 IC32.47
N$228: IC32.60 R73.2
N$229: IC32.42 R81.1
N$230: PWR5.A R84.5
N$231: R83.6 U12.A
N$232: IC32.8 R83.4
N$233: IC32.9 R83.3
N$234: D48.1 L17.2
N$235: D48.2 L18.2
N$236: C132.1 IC36.10
N$237: C133.1 IC36.8
N$238: C133.2 IC36.12
N$239: C135.1 IC31.10
N$240: C130.1 IC31.20
N$241: D43.6 R74.2 USB6.3
N$242: D43.1 R75.2 USB6.2
N$243: AUX22.4 D42.6 R76.1
N$244: AUX24.4 D42.1 R76.4
N$245: D47.3 IN5.4 R84.7
N$246: D47.4 IN5.3 R84.6
N$247: D44.3 ENGINE47.3 R80.7
N$248: D44.6 ENGINE46.3 R80.6
N$249: D45.1 ENGINE42.3 R79.6
N$250: D45.3 ENGINE41.3 R79.5
N$251: MMCX6.S MODULE6.1
N$252: MODULE6.4 MODULE6.6
N$253: MODULE6.3 MODULE6.7
N$254: C136.2 IC32.6 Q6.1
N$255: C137.2 IC32.5 Q6.3
N$256: D46.3 IN5.8 R82.8
N$257: D46.4 IN5.5 R82.5
N$258: D45.6 ENGINE44.3 R79.8
N$259: D45.4 ENGINE43.3 R79.7
N$260: D44.4 ENGINE45.3 R80.5
N$261: D44.1 ENGINE48.3 R80.8
N$262: AUX22.3 D42.4 R76.2
N$263: AUX21.4 D41.3 R77.4
N$264: AUX21.3 D41.4 R77.3
N$265: R83.5 U11.A
N$266: AUX23.3 D41.6 R77.2
N$267: AUX23.4 D41.1 R77.1
N$268: D46.1 IN5.7 R82.7
N$269: D46.6 IN5.6 R82.6
N$270: AUX24.3 D42.3 R76.3
RF_IRQ: IC1.4 MODULE1.14
RF_IRQ1: IC8.4 MODULE2.14
RF_IRQ2: IC14.4 MODULE3.14
RF_IRQ3: IC20.4 MODULE4.14
RF_IRQ4: IC26.4 MODULE5.14
RF_IRQ5: IC32.4 MODULE6.14
RF_MISO: IC1.22 IC5.2 MODULE1.10
RF_MISO1: IC8.22 IC10.2 MODULE2.10
RF_MISO2: IC14.22 IC16.2 MODULE3.10
RF_MISO3: IC20.22 IC22.2 MODULE4.10
RF_MISO4: IC26.22 IC28.2 MODULE5.10
RF_MISO5: IC32.22 IC34.2 MODULE6.10
RF_MOSI: IC1.23 IC5.5 MODULE1.11
RF_MOSI1: IC8.23 IC10.5 MODULE2.11
RF_MOSI2: IC14.23 IC16.5 MODULE3.11
RF_MOSI3: IC20.23 IC22.5 MODULE4.11
RF_MOSI4: IC26.23 IC28.5 MODULE5.11
RF_MOSI5: IC32.23 IC34.5 MODULE6.11
RF_SCLK: IC1.21 IC5.6 MODULE1.12
RF_SCLK1: IC8.21 IC10.6 MODULE2.12
RF_SCLK2: IC14.21 IC16.6 MODULE3.12
RF_SCLK3: IC20.21 IC22.6 MODULE4.12
RF_SCLK4: IC26.21 IC28.6 MODULE5.12
RF_SCLK5: IC32.21 IC34.6 MODULE6.12
RF_SEL: IC1.20 MODULE1.13
RF_SEL1: IC8.20 MODULE2.13
RF_SEL2: IC14.20 MODULE3.13
RF_SEL3: IC20.20 MODULE4.13
RF_SEL4: IC26.20 MODULE5.13
RF_SEL5: IC32.20 MODULE6.13
RXD1: IC8.15 R21.8
RXD2: IC8.54 R20.8
RXD3: IC1.52 R5.5
RXD4: IC1.15 R4.8
RXD5: IC1.54 R5.8
RXD6: IC8.52 R20.5
RXD7: IC14.15 R35.8
RXD8: IC14.54 R34.8
RXD9: IC14.52 R34.5
RXD10: IC20.15 R49.8
RXD11: IC20.54 R48.8
RXD12: IC20.52 R48.5
RXD13: IC26.15 R63.8
RXD14: IC26.54 R62.8
RXD15: IC26.52 R62.5
RXD16: IC32.15 R77.8
RXD17: IC32.54 R76.8
RXD18: IC32.52 R76.5
SCL: IC1.29 IC2.8 IC3.1 IC4.23 R13.2 TEST2.1
SCL1: IC7.23 IC8.29 IC9.8 IC12.1 R15.2 TEST5.1
SCL2: IC13.23 IC14.29 IC15.8 IC18.1 R29.2 TEST9.1
SCL3: IC19.23 IC20.29 IC21.8 IC24.1 R43.2 TEST13.1
SCL4: IC25.23 IC26.29 IC27.8 IC30.1 R57.2 TEST17.1
SCL5: IC31.23 IC32.29 IC33.8 IC36.1 R71.2 TEST21.1
SDA: IC1.30 IC2.7 IC3.16 IC4.24 R14.2 TEST1.1
SDA1: IC7.24 IC8.30 IC9.7 IC12.16 R16.2 TEST6.1
SDA2: IC13.24 IC14.30 IC15.7 IC18.16 R30.2 TEST10.1
SDA3: IC19.24 IC20.30 IC21.7 IC24.16 R44.2 TEST14.1
SDA4: IC25.24 IC26.30 IC27.7 IC30.16 R58.2 TEST18.1
SDA5: IC31.24 IC32.30 IC33.7 IC36.16 R72.2 TEST22.1
SWCLK: IC1.49 SWD.1
SWCLK1: IC8.49 SWD1.1
SWCLK2: IC14.49 SWD2.1
SWCLK3: IC20.49 SWD3.1
SWCLK4: IC26.49 SWD4.1
SWCLK5: IC32.49 SWD5.1
SWDIO: IC1.46 SWD.2
SWDIO1: IC8.46 SWD1.2
SWDIO2: IC14.46 SWD2.2
SWDIO3: IC20.46 SWD3.2
SWDIO4: IC26.46 SWD4.2
SWDIO5: IC32.46 SWD5.2
TXD1: IC8.14 R21.7
TXD2: IC8.51 R20.6
TXD3: IC1.51 R5.6
TXD4: IC1.14 R4.7
TXD5: IC1.53 R5.7
TXD6: IC8.53 R20.7
TXD7: IC14.14 R35.7
TXD8: IC14.51 R34.6
TXD9: IC14.53 R34.7
TXD10: IC20.14 R49.7
TXD11: IC20.51 R48.6
TXD12: IC20.53 R48.7
TXD13: IC26.14 R63.7
TXD14: IC26.51 R62.6
TXD15: IC26.53 R62.7
TXD16: IC32.14 R77.7
TXD17: IC32.51 R76.6
TXD18: IC32.53 R76.7
V_RC: C1.1 D1.3 IC6.1 IC6.3
V_RC1: C33.1 D16.3 IC11.1 IC11.3
V_RC2: C57.1 D24.3 IC17.1 IC17.3
V_RC3: C81.1 D32.3 IC23.1 IC23.3
V_RC4: C105.1 D40.3 IC29.1 IC29.3
V_RC5: C129.1 D48.3 IC35.1 IC35.3
VCC: D2.2 L2.1 R10.2 USB1.1
VCC1: D11.2 L6.1 R25.2 USB2.1
VCC2: D19.2 L9.1 R39.2 USB3.1
VCC3: D27.2 L12.1 R53.2 USB4.1
VCC4: D35.2 L15.1 R67.2 USB5.1
VCC5: D43.2 L18.1 R81.2 USB6.1
VCC_PANEL: E$7.B10 E$7.B11
VCCA: C2.1 C13.1 C14.1 C15.1 IC2.1 IC2.2 IC3.2 IC3.4 IC3.6 IC3.13 IC4.8 IC4.9 IC4.13 L1.2
VCCA1: C16.1 C35.1 C42.1 C48.1 IC7.8 IC7.9 IC7.13 IC9.1 IC9.2 IC12.2 IC12.4 IC12.6 IC12.13 L4.2
VCCA2: C49.1 C59.1 C66.1 C72.1 IC13.8 IC13.9 IC13.13 IC15.1 IC15.2 IC18.2 IC18.4 IC18.6 IC18.13 L7.2
VCCA3: C73.1 C83.1 C90.1 C96.1 IC19.8 IC19.9 IC19.13 IC21.1 IC21.2 IC24.2 IC24.4 IC24.6 IC24.13 L10.2
VCCA4: C97.1 C107.1 C114.1 C120.1 IC25.8 IC25.9 IC25.13 IC27.1 IC27.2 IC30.2 IC30.4 IC30.6 IC30.13 L13.2
VCCA5: C121.1 C131.1 C138.1 C144.1 IC31.8 IC31.9 IC31.13 IC33.1 IC33.2 IC36.2 IC36.4 IC36.6 IC36.13 L16.2

## Tracks (layer width: path | path; a pad name or v marks a point on that pad's centre or on a via)
!SRST  (via drill 0.3)
  Top 0.2: IC1.7 20.65,70.45 19.85,71.25 v19.85,71.8 | v15.25,76.65 15.25,77.4 14.85,77.8 14.85,79.45 13.6,80.7 v13,80.7
  Bottom 0.2: SWD.3 11.07,77.72 R12.2 C19.1 12.05,79.75 v13,80.7 | v15.25,76.65 15.25,76.6 14.65,76 14.65,75.1 15.65,74.1 15.65,72.25 16.15,71.75 19.95,71.75 v19.85,71.8
!SRST1  (via drill 0.3)
  Top 0.2: IC8.7 59.05,70.45 58.25,71.25 v58.25,71.8 | v53.65,76.65 53.65,77.4 53.25,77.8 53.25,79.45 52,80.7 v51.4,80.7